# Altium PCB e3rev2.PcbDoc (part 1 of 2)
Units mm, origin at the board's own origin, x right, y up, seen from the top; angles counter-clockwise.
Board outline 65 x 49 mm, 4 copper layers (Top Layer, Int1 (GND), Int2 (PWR), Bottom Layer), stack 1.57 mm thick; 59 components, 45 nets, 231 pads, 138 vias.
Unrouted connection lines stored in the file: 2.
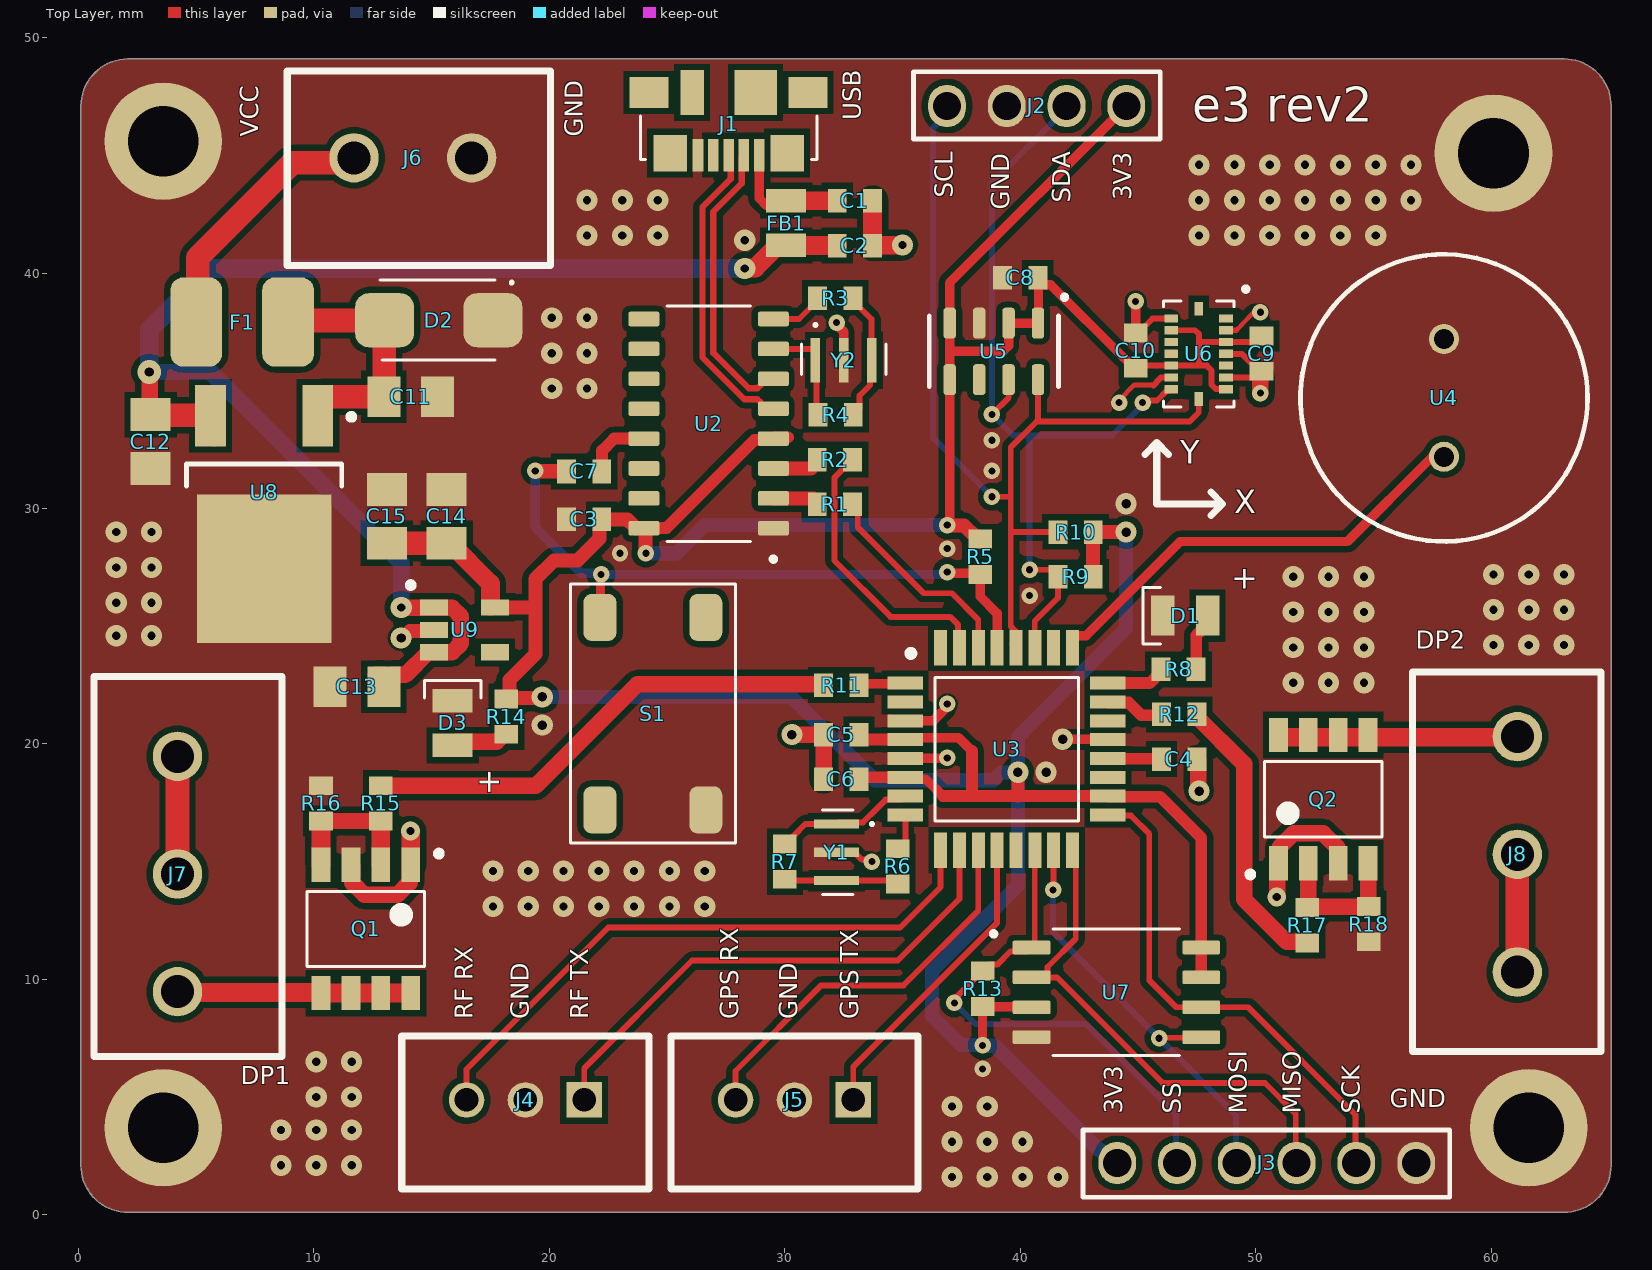
[diagram p0: Top Layer view]
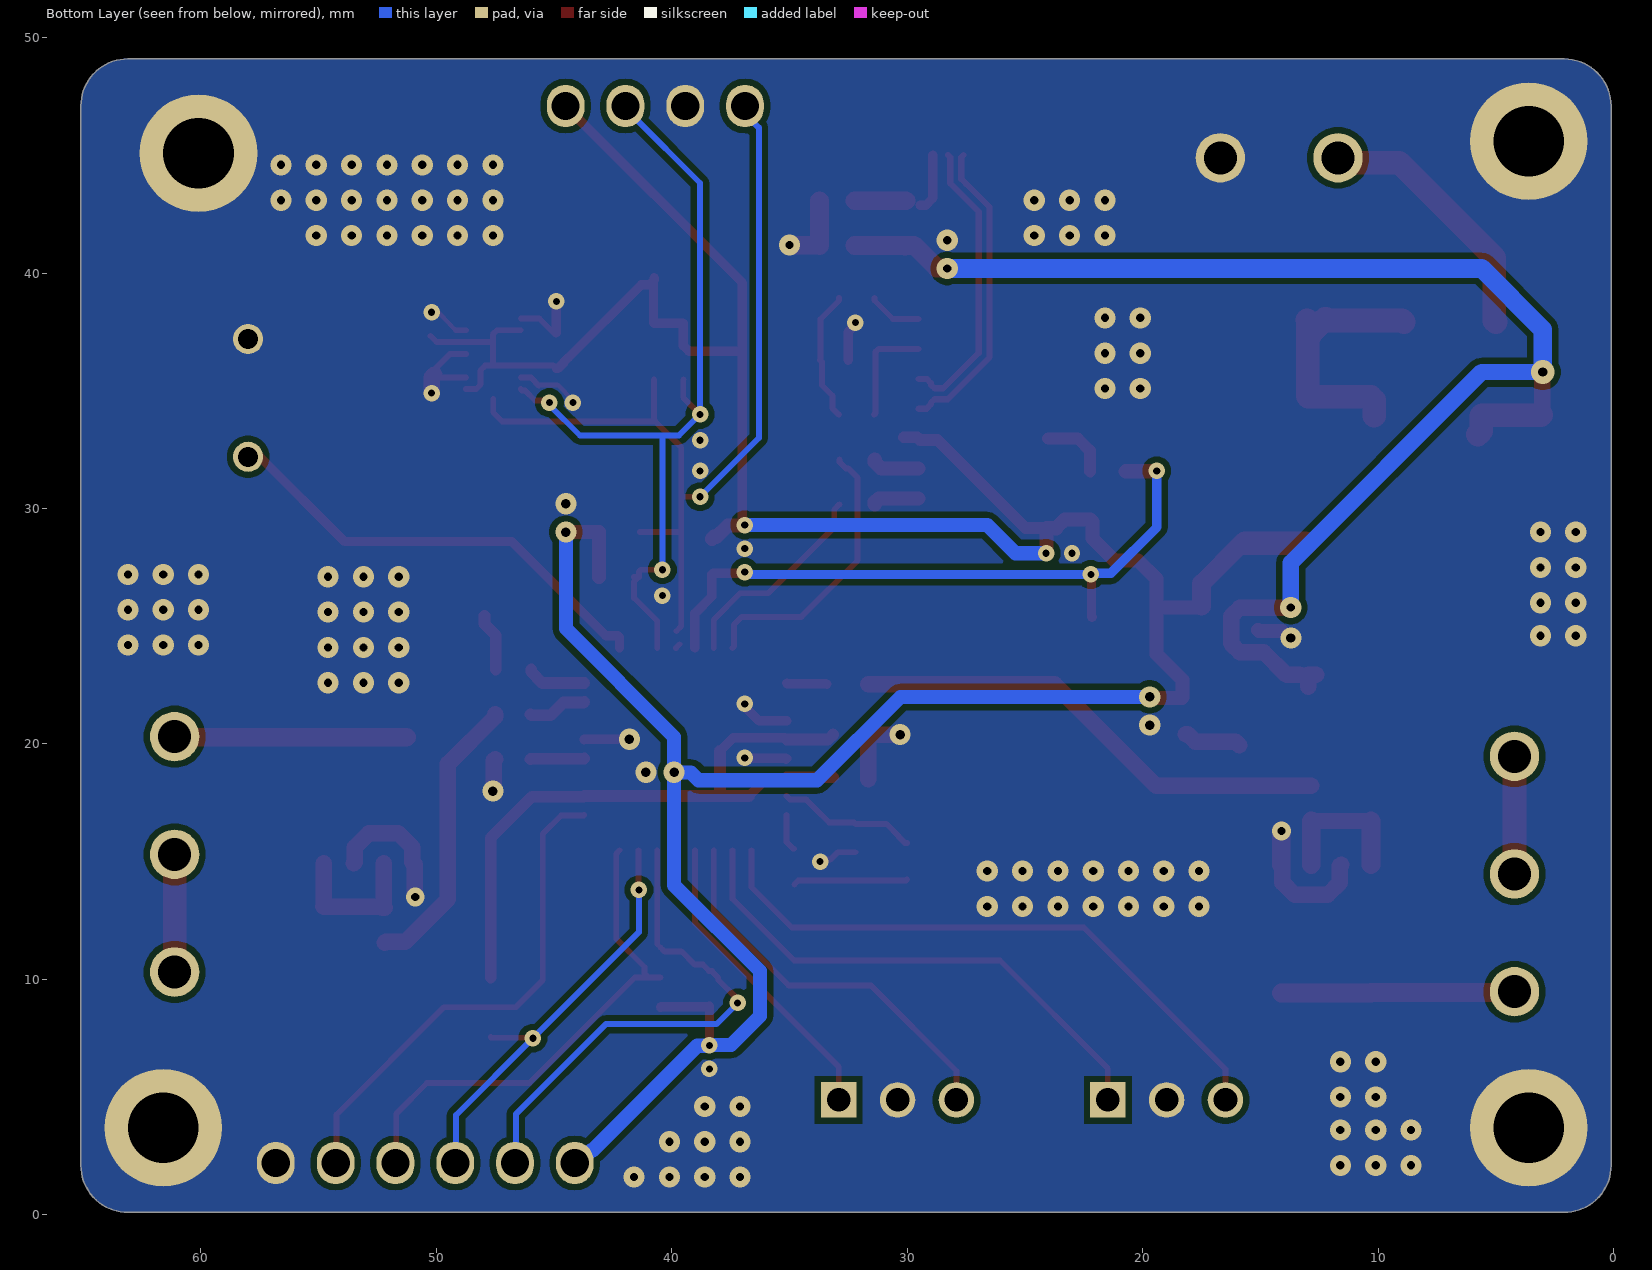
[diagram p1: Bottom Layer view, seen from below]
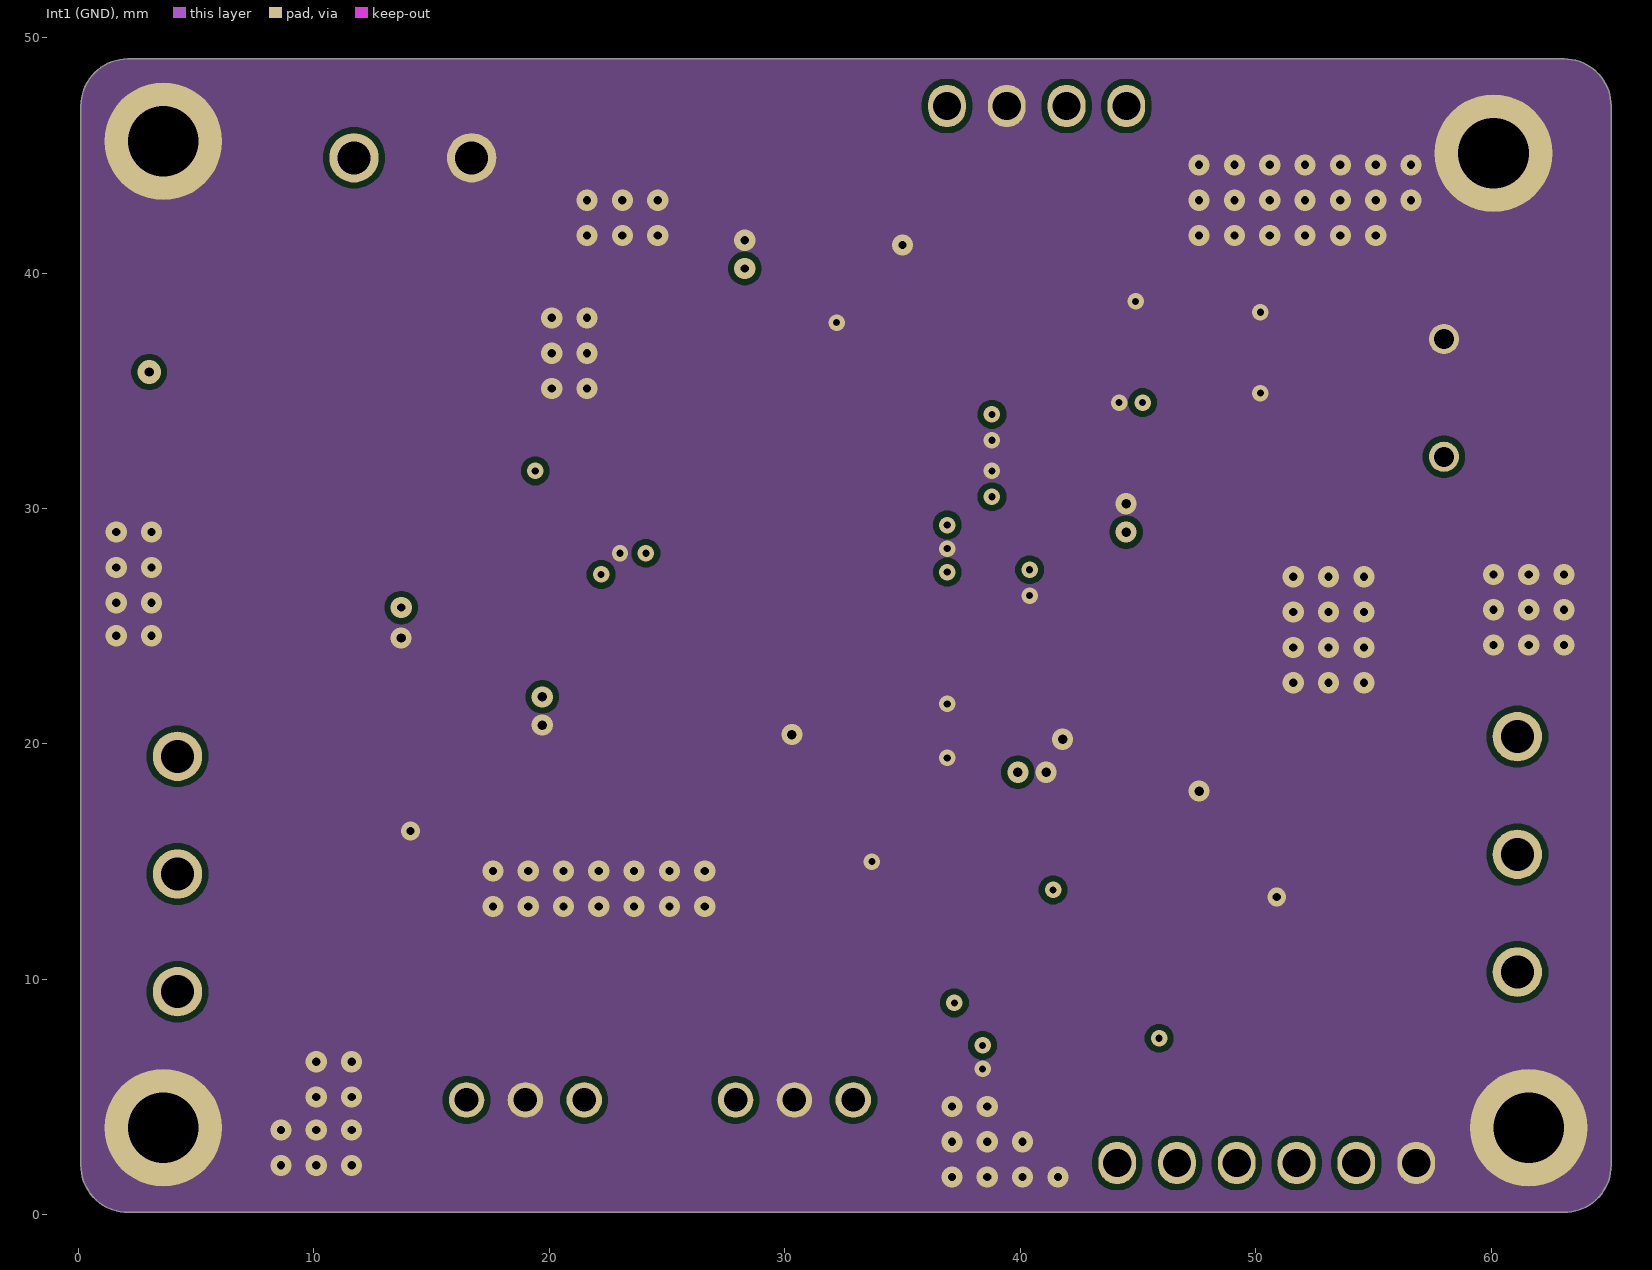
[diagram p2: Int1 (GND)]
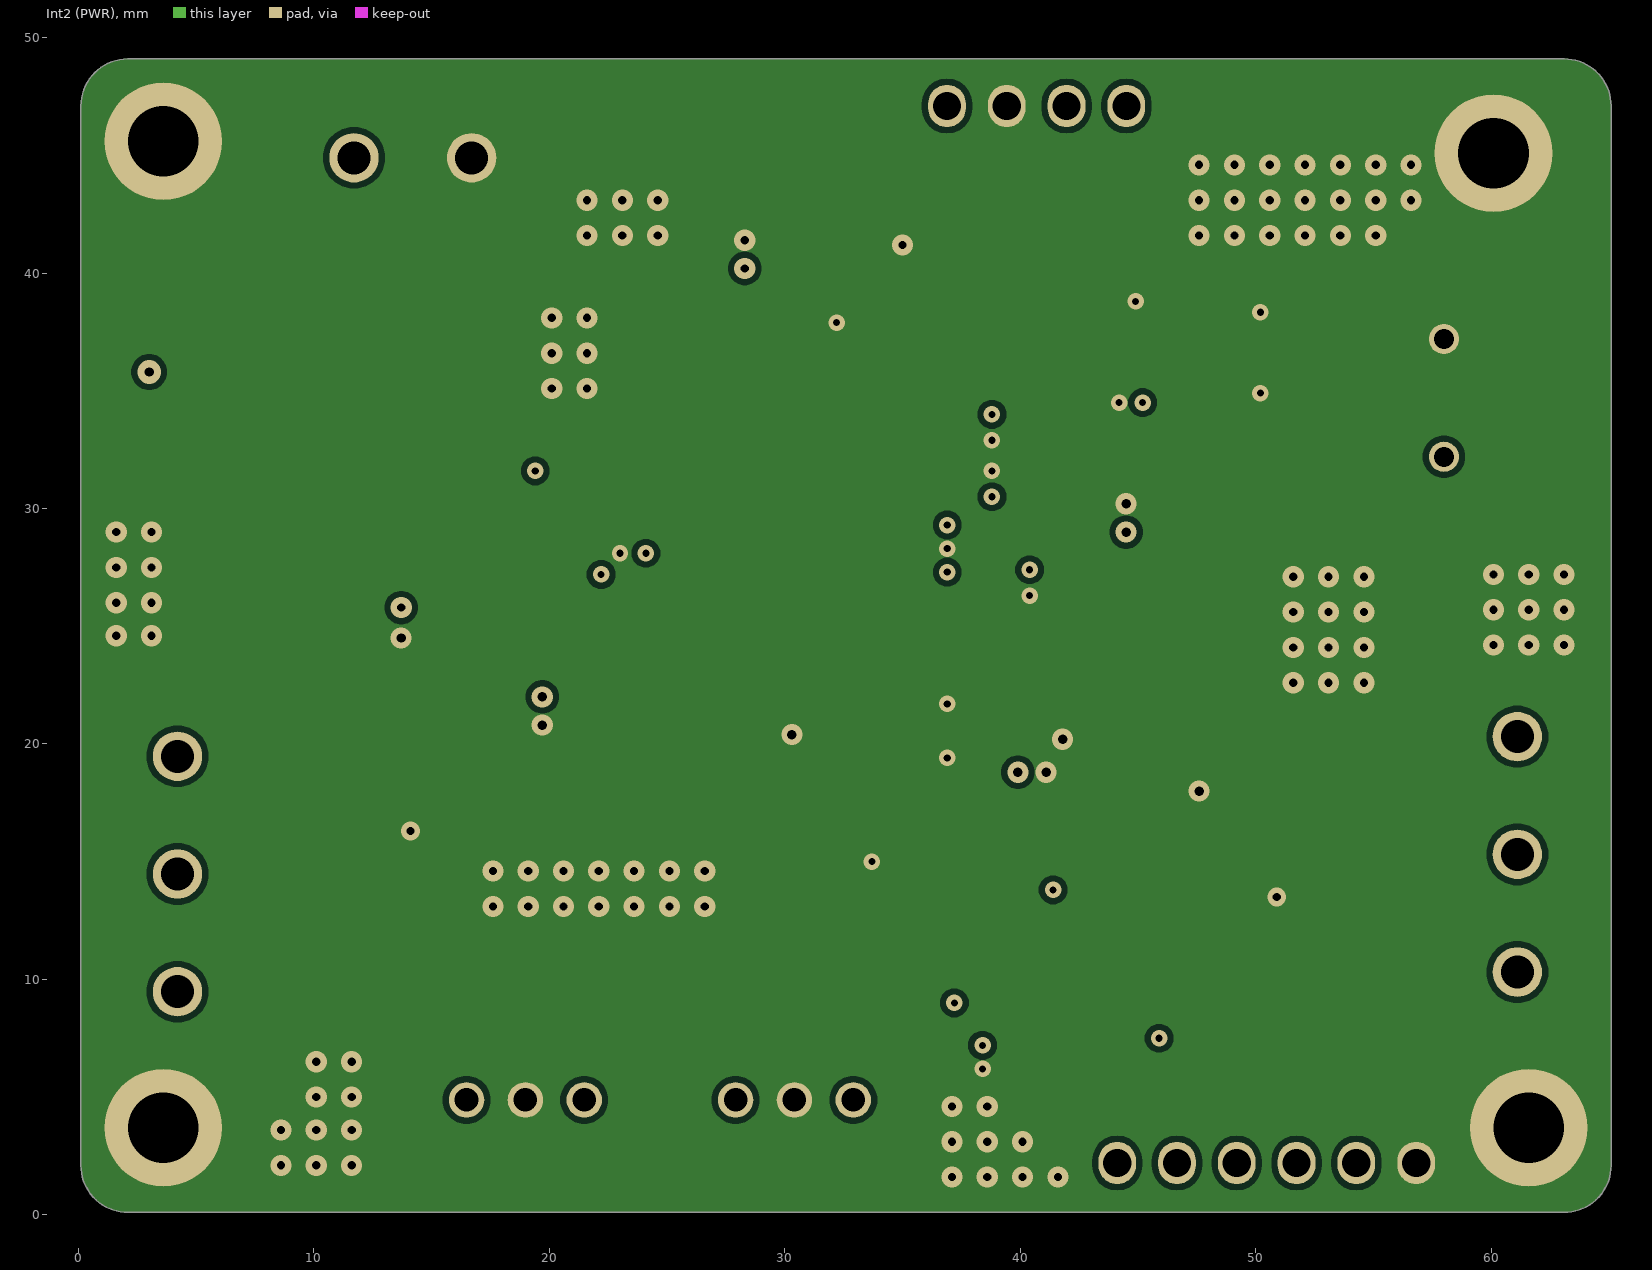
[diagram p3: Int2 (PWR)]
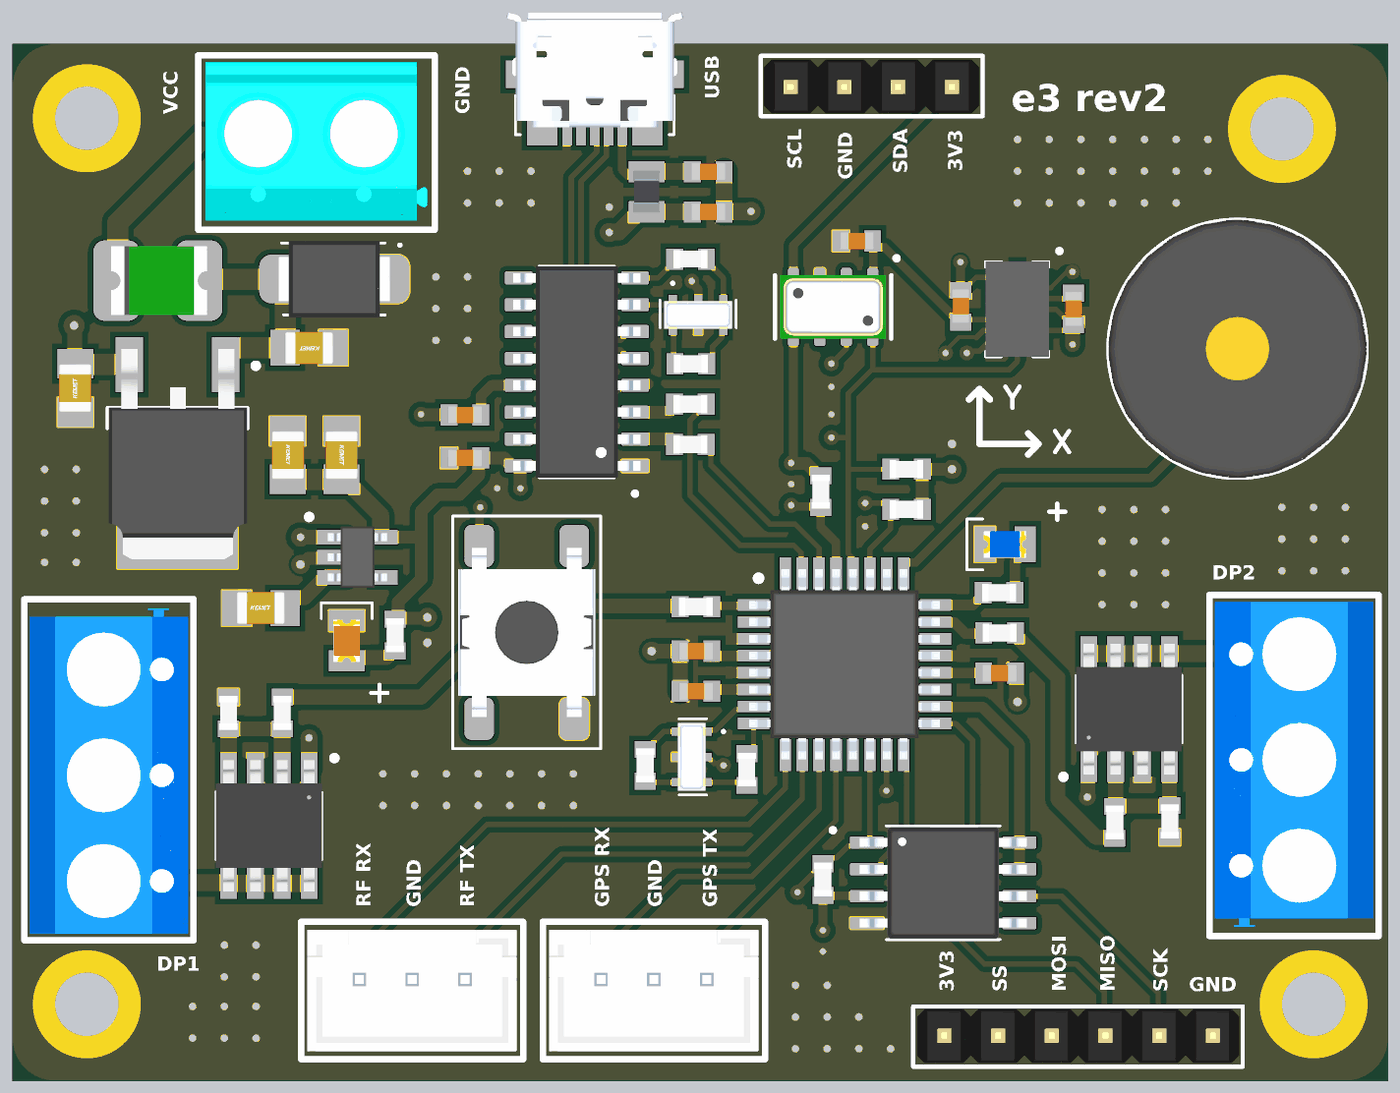
[diagram p4: 3D render of the assembled board from above, using the file's embedded part models]

## Layer stack, top to bottom
Top Solder: solder mask 0.0254, SM-001, Dk 4
Top Layer: signal copper 0.035
Dielectric 1: prepreg 0.2, PP-017, Dk 4.6
Int1 (GND): signal copper 0.0175
Dielectric 3: core 1.065, Core-039, Dk 4.6
Int2 (PWR): signal copper 0.0175
Dielectric 5: prepreg 0.2, PP-017, Dk 4.6
Bottom Layer: signal copper 0.035
Bottom Solder: solder mask 0.0254, SM-001, Dk 4

## Board outline
2.1,0.1 cw(c2.1,2.1) 0.1,2.1 0.1,47.1 cw(c2.1,47.1) 2.1,49.1 63.1,49.1 cw(c63.1,47.1) 65.1,47.1 65.1,2.1 cw(c63.1,2.1) 63.1,0.1

## Design rules (kind name [scope] priority, off if disabled: settings)
Clearance [All] p1: gap=0.254 ignorepadtopadclearanceinfootprint=FALSE except(0.1: SMDPad-SMDPad; 0.2: Arc-Arc Arc-Track Arc-SMDPad Arc-Hole Track-Track Track-SMDPad Track-Hole SMDPad-THPad SMDPad-Hole THPad-Hole Via-Hole Fill-Hole Poly-Hole Region-Hole Text-Hole; 0.3: Arc-Via Track-Via Via-Via; 0.33: Arc-THPad Track-THPad; 0.5: THPad-THPad)
DiffPairsRouting [All] p1: maxlimit=0.254 minlimit=0.203 mostfreqgap=0.254 toplayer_maxgap=0.203 toplayer_prefgap=0.203 toplayer_minwidth=0.26 toplayer_maxwidth=0.26 toplayer_prefwidth=0.26 midlayer1_minwidth=0.381 midlayer1_maxwidth=0.381 midlayer1_prefwidth=0.381 midlayer2_minwidth=0.381 midlayer2_maxwidth=0.381 midlayer2_prefwidth=0.381 bottomlayer_maxgap=0.203 bottomlayer_prefgap=0.203 bottomlayer_minwidth=0.26 bottomlayer_maxwidth=0.26 bottomlayer_prefwidth=0.26 maxuncoupledlength=12.7
HoleSize [All] p1: absolutevalues=TRUE maxlimit=6 minlimit=0.3 maxpercent=80.000 minpercent=20.000
HoleToHoleClearance [All] p1: gap=0.5 allowstackedmicrovias=TRUE
MinimumSolderMaskSliver [All] p1: minsoldermaskwidth=0.005
PlaneConnect [All] p1: planeconnectstyle=Direct reliefexpansion=0.508 reliefentries=4 reliefconductorwidth=0.254 reliefairgap=0.254
PolygonConnect [All] p1: connectstyle=Direct reliefconductorwidth=0.254 reliefentries=4 polygonreliefangle="90 Angle" airgapwidth=0.254
RoutingVias [All] p1: holewidth=0.3 width=0.7 viastyle="Through Hole" minholewidth=0.3 minwidth=0.5 maxholewidth=0.7 maxwidth=1
SilkToSilkClearance [All] p1: silktosilkclearance=0.2
SolderMaskExpansion [All] p1: expansion=0.05 istentingtop=FALSE
UnRoutedNet [All] p1: checkbadconnections=TRUE
Width [All] p1: maxlimit=1 minlimit=0.2 preferedwidth=0.3 minimp=50.000000 maximp=50.000000 favimp=50.000000
23 further rules are at their usual default settings.

## Classes and differential pairs
differential pair class DIFF_USB: USB_D
component class Power: C11 C12 C13 C14 C15 D2 D3 F1 J6 J7 J8 Q1 Q2 R14 R15 R16 R17 R18 U8 U9
component class Peripheral: C8 C9 C10 J2 J3 J4 J5 R13 U5 U6 U7
component class MCU: C1 C2 C3 C4 C5 C6 C7 D1 FB1 J1 R1 R2 R3 R4 R5 R6 R7 R8 R9 R10 S1 U2 U3 U4 Y1 Y2
differential pair USB_D: +USB_D_P -USB_D_N

## Components (designator, comment, footprint, x,y, rotation, side; value= is the part's Value field where it differs from the comment)
C1 "2u2" "CAP 0603" 32.979,43.077 r0 top
C2 "2u2" "CAP 0603" 32.979,41.172 r0 top
C3 "100n" "CAP 0603" 21.475,29.542 r0 top
C4 "100n" "CAP 0603" 46.753,19.355 r0 top
C5 "100n" "CAP 0603" 32.4,20.4 r0 top
C6 "4u7" "CAP 0603" 32.4,18.5 r0 top
C7 "100n" "CAP 0603" 21.475,31.574 r180 top
C8 "100n" "CAP 0603" 40,39.8 r0 top
C9 "100n" "CAP 0603" 50.25,36.584 r90 top
C10 "100n" "CAP 0603" 44.916,36.711 r270 top
C11 "0u33" "CAP 0805" 14.109,34.749 r180 top
C12 "100n" "CAP 0805" 3.06,32.844 r90 top
C13 "100n" "CAP 0805" 11.823,22.43 r0 top
C14 "4u7" "CAP 0805" 15.633,29.669 r270 top
C15 "100n" "CAP 0805" 13.093,29.669 r270 top
D1 "LED 0805 BLUE" "LED 0805 BLUE" 47.007,25.451 r0 top
D2 "SMBJ12CA-13-F" SMBJ12CA-13-F 15.3,38 r0 top
D3 "LED 0805 RED" "LED 0805 RED" 15.887,20.894 r270 top
F1 "0ZCG0075FF2C" 0ZCG0075FF2C 7.002,38.049 r0 top
FB1 "120R" "FB 0805" 30.058,42.127 r90 top
J1 "47346-0001" MOLEX_47346-0001 27.613,47.675 r180 top
J2 "1x4 HEADER MALE" "1X4 HEADER MALE" 40.7,47.1 r0 top
J3 "1x6 HEADER MALE" "1X6 HEADER MALE" 50.47,2.2 r180 top
J4 "JST B3B-XH-A" JST_B3B-XH-A 18.98,4.352 r180 top
J5 "JST B3B-XH-A" JST_B3B-XH-A 30.41,4.352 r180 top
J6 "KF301 2P Terminal" "KF301 2P" 14.2,44.9 r0 top
J7 "KF301 3P Terminal" "KF301 3P" 4.203,14.476 r90 top
J8 "KF301 3P Terminal" "KF301 3P" 61.117,15.311 r270 top
Q1 "DMG4822SSD-13" DMG4822SSD-13 12.204,12.143 r270 top
Q2 "DMG4822SSD-13" DMG4822SSD-13 52.873,17.657 r90 top
R1 "1K" "RES 0603" 32.131,30.177 r0 top
R2 "1K" "RES 0603" 32.131,32.082 r0 top
R3 "27R" "RES 0603" 32.143,38.94 r180 top
R4 "1M" "RES 0603" 32.155,33.987 r180 top
R5 "10K" "RES 0603" 38.3,27.95 r270 top
R6 "27R" "RES 0603" 34.8,14.8 r90 top
R7 "1M" "RES 0603" 30,15 r90 top
R8 "1K" "RES 0603" 46.724,23.165 r0 top
R9 "10K" "RES 0603" 42.35,27.1 r0 top
R10 "10K" "RES 0603" 42.35,29 r0 top
R11 "1K" "RES 0603" 32.4,22.5 r180 top
R12 "1K" "RES 0603" 46.753,21.26 r0 top
R13 "10K" "RES 0603" 38.4,9.6 r270 top
R14 "1K" "RES 0603" 18.173,21.16 r270 top
R15 "1K" "RES 0603" 12.839,17.477 r270 top
R16 "10K" "RES 0603" 10.299,17.477 r270 top
R17 "1K" "RES 0603" 52.2,12.3 r90 top
R18 "10K" "RES 0603" 54.8,12.35 r90 top
S1 "B3FS-1000P" B3FS-1000P 24.396,21.287 r270 top
U2 "CH340G" CH340G 26.765,33.606 r180 top
U3 "ATMEGA328P-AU" ATMEGA328P-AU 39.42,19.784 r0 top
U4 "PS1240P02BT" PS1240P02BT 58,34.7 r270 top
U5 "MS561101BA03-50" MS5611-01BA3 38.881,36.678 r270 top
U6 "BMI088" BMI088 47.583,36.572 r270 top
U7 "W25Q64JVSSIQ" W25Q64JVSSIQ 44.086,9.449 r0 top
U8 "L78M05CDT-TR" L78M05CDT-TR 7.886,29.796 r270 top
U9 "MIC5205-3.3YM5-TR" MIC5205-3.3YM5-TR 16.395,24.843 r270 top
Y1 "CSTNE16M0V53Z000R0" CSTNE16M0V53Z000R0 32.2,15.4 r270 top
Y2 "CSTNE12M0G550000R0" CSTNE16M0V53Z000R0 32.5,36.3 r0 top

## Footprints (in the part's own frame and the unit in brackets; to place one, negate y for a bottom-side part, rotate by r counter-clockwise, add the part's x,y. Pads: shape width x height; smd on the part's side, far side on the other; paste and mask are expansions set on the pad)
0ZCG0075FF2C [mm] "PTC"
  rrect50% 2.2x3.8 smd: 1(-2,-0.125) 2(1.9,-0.125)
  body extent -2.26,-1.75 2.29,1.49, height 0.7
"1X4 HEADER MALE" [mm]
  oval 1.6x1.8 hole 1.2: 1(-3.81,0) 2(-1.27,0) 3(1.27,0) 4(3.81,0)
  silkscreen extent -5.23,-1.4 5.25,1.45, body extent -5.08,-1.27 5.08,1.27, height 9.2
"1X6 HEADER MALE" [mm]
  oval 1.6x1.8 hole 1.2: 1(-6.35,0) 2(-3.81,0) 3(-1.27,0) 4(1.27,0) 5(3.81,0) 6(6.35,0)
  silkscreen extent -7.77,-1.4 7.8,1.45, body extent -7.62,-1.27 7.62,1.27, height 9.2
ATMEGA328P-AU [mm]
  rect 1.5x0.55 smd: 1(-4.3,2.8) 2(-4.3,2) 3(-4.3,1.2) 5(-4.3,-0.4) 6(-4.3,-1.2) 7(-4.3,-2) 8(-4.3,-2.8) 17(4.3,-2.8) 18(4.3,-2) 19(4.3,-1.2) 20(4.3,-0.4) 21(4.3,0.4) 22(4.3,1.2) 23(4.3,2) 24(4.3,2.8) ""(-4.3,0.4)
  rect 0.55x1.5 smd: 9(-2.8,-4.3) 10(-2,-4.3) 11(-1.2,-4.3) 12(-0.4,-4.3) 13(0.4,-4.3) 14(1.2,-4.3) 15(2,-4.3) 16(2.8,-4.3) 25(2.8,4.3) 26(2,4.3) 27(1.2,4.3) 28(0.4,4.3) 29(-0.4,4.3) 30(-1.2,4.3) 31(-2,4.3) 32(-2.8,4.3)
  silkscreen extent -4.19,-3.05 3.05,4.19, body extent -4.5,-4.5 4.5,4.5, height 1.2
B3FS-1000P [mm]
  rrect50% 2x1.4 smd: 1(4.088,-2.25) 2(-4.087,-2.25) 3(4.088,2.25) 4(-4.087,2.25)
  silkscreen extent -5.5,-3.5 5.5,3.5, body extent -4,-3.25 4,3.25, height 3.11
BMI088 [mm]
  rect 0.35x0.59 smd: 1(-1.5,1.165) 2(-1,1.165) 3(-0.5,1.165) 4(0,1.165) 5(0.5,1.165) 6(1,1.165) 7(1.5,1.165) 9(1.5,-1.165) 10(1,-1.165) 11(0.5,-1.165) 12(0,-1.165) 13(-0.5,-1.165) 14(-1,-1.165) 15(-1.5,-1.165)
  rect 0.59x0.35 smd: 8(1.915,0) 16(-1.915,0)
  silkscreen extent -2.85,-1.5 2.25,2.1, body extent -2.25,-1.5 2.25,1.5, height 1.55
"CAP 0603" [mm]
  rect 0.8x1 smd: 1(-0.75,0) 2(0.75,0)
  body extent -0.8,-0.4 0.8,0.4, height 0.51
"CAP 0805" [mm]
  rect 1.4x1.7 smd: 1(-1.143,0) 2(1.143,0)
  body extent -1.15,-0.76 1.15,0.79, height 1.01
CH340G [mm]
  rrect25% 1.31x0.62 smd: 1(-2.75,4.445) 2(-2.75,3.175) 3(-2.75,1.905) 4(-2.75,0.635) 5(-2.75,-0.635) 6(-2.75,-1.905) 7(-2.75,-3.175) 8(-2.75,-4.445) 9(2.75,-4.445) 10(2.75,-3.175) 11(2.75,-1.905) 12(2.75,-0.635) 13(2.75,0.635) 14(2.75,1.905) 15(2.75,3.175) 16(2.75,4.445)
  silkscreen extent -2.85,-5 1.78,5.85, body extent -3,-5 3,5, height 1.8
CSTNE16M0V53Z000R0 [mm]
  rect 0.4x1.9 smd: 1(-1.2,0) 2(0,0) 3(1.2,0)
  silkscreen extent -1.8,-0.6 1.8,1.55, body extent -1.6,-0.65 1.6,0.65, height 1
DMG4822SSD-13 [mm]
  rect 1.45x0.8 smd: 1(-2.725,1.905) 2(-2.725,0.635) 3(-2.725,-0.635) 4(-2.725,-1.905) 5(2.725,-1.905) 6(2.725,-0.635) 7(2.725,0.635) 8(2.725,1.905)
  silkscreen extent -3.32,-2.5 1.6,3.22, body extent -3.1,-2.5 3.1,2.5, height 1.7
"FB 0805" [mm]
  rect 1x1.7 smd: 1(-0.95,0) 2(0.95,0)
  body extent -1,-0.63 1,0.63, height 0.86
JST_B3B-XH-A [mm]
  rect 1.508x1.508 / inner round 1.508 / far side rect 1.508x1.508 hole 1: 1(-2.5,-0.525)
  round 1.508 hole 1: 2(0,-0.525) 3(2.5,-0.525)
  silkscreen extent -5.25,-3.25 5.25,3.25, body extent -4.95,-2.88 4.95,2.88, height 7
"KF301 2P" [mm] "2 Pin 5mm Terminal"
  round 2.1 hole 1.4: 1(-2.5,0) 2(2.5,0)
  silkscreen extent -5.33,-4.57 5.84,3.68, body extent -5,-4.13 5.5,3.37, height 10
"KF301 3P" [mm] "3 Pin 5mm Terminal"
  round 2.1 hole 1.4: 1(-5,0) 2(0,0) 3(5,0)
  silkscreen extent -7.75,-4.45 8.38,3.56, body extent -7.45,-4.19 7.95,3.31, height 10.01
L78M05CDT-TR [mm]
  rect 2.6x1.3 smd: 1(-4.15,2.28) 3(-4.15,-2.28)
  rect 6.3x5.7 smd: 2(2.35,0)
  silkscreen extent -4.22,-3.3 -1.15,3.83, body extent -4.89,-3.25 5.04,3.29, height 2.34
"LED 0805 BLUE" [mm]
  rect 1x1.7 smd: A(0.95,0) K(-0.95,0)
  silkscreen extent -1.8,-1.2 -1.05,1.2, body extent -1,-0.63 1,0.63, height 1.12
"LED 0805 RED" [mm]
  rect 1x1.7 smd: A(0.95,0) K(-0.95,0)
  silkscreen extent -1.8,-1.2 -1.05,1.2, body extent -1,-0.63 1,0.63, height 1.12
MIC5205-3.3YM5-TR [mm]
  rect 0.69x1.2 smd: 1(-0.95,-1.3) 2(0,-1.3) 3(0.95,-1.3) 4(0.95,1.3) 5(-0.95,1.3)
  silkscreen extent -2,-2.39 -1.81,-2.19, body extent -1.45,-1.4 1.45,1.4, height 1.45
MOLEX_47346-0001 [mm]
  rect 0.45x1.38 smd: 1(-1.3,2.66) 2(-0.65,2.66) 3(0,2.66) 4(0.65,2.66) 5(1.3,2.66)
  rect 1.425x1.55 smd: S1(-2.488,2.575) S2(2.488,2.575)
  rect 1.65x1.3 smd: S3(-3.375,0) S6(3.375,0)
  rect 1.8x1.9 smd: S4(-1.15,0)
  rect 1x1.9 smd: S5(1.55,0)
  silkscreen extent -3.75,1 3.75,2.85, body extent -4.18,-2.93 4.18,2.5, height 2.7
MS5611-01BA3 [mm]
  rrect50% 1.31x0.53 smd: 1(-1.2,1.875) 2(-1.2,0.625) 3(-1.2,-0.625) 4(-1.2,-1.875) 5(1.2,-1.875) 6(1.2,-0.625) 7(1.2,0.625) 8(1.2,1.875)
  silkscreen extent -2.4,-2.75 1.5,3.1, body extent -1.5,-2.5 1.5,2.5, height 1.1
PS1240P02BT [mm] "Buzzer"
  round 1.28 hole 0.85: 1(-2.5,0) 2(2.5,0)
  silkscreen extent -6.1,-6.1 6.1,6.1, body extent -6.1,-6.1 6.1,6.1, height 6.51
"RES 0603" [mm]
  rect 0.8x1 smd: 1(-0.75,0) 2(0.75,0)
  body extent -0.8,-0.43 0.8,0.43, height 0.52
SMBJ12CA-13-F [mm]
  rrect50% 2.5x2.3 smd: 1(2.3,0) 2(-2.3,0)
  silkscreen extent -2.5,-1.7 3.15,1.7, body extent -2.65,-1.81 2.65,1.81, height 2.5
W25Q64JVSSIQ [mm] "SPI Flash Memory"
  rrect25% 1.61x0.58 smd: 1(-3.605,1.905) 2(-3.605,0.635) 3(-3.605,-0.635) 4(-3.605,-1.905) 5(3.605,-1.905) 6(3.605,-0.635) 7(3.605,0.635) 8(3.605,1.905)
  silkscreen extent -5.31,-2.69 2.69,2.69, body extent -3.95,-2.64 3.95,2.64, height 2.16

## Part data
C1 C2 C3 C4 C5 C6 C7 C8 C9 C10: library part "CAP 0603 50V", "Capacitor SMD 0603 50V"
C11 C12 C13 C14 C15: library part "CAP 0805 50V", "Capacitor SMD 0805 50V"
D1: "LED 0805 GREEN SMD"
D2: "TVS DIODE 12VWM 19.9VC SMB", Breakdown Voltage=15.3V, Capacitance=340pF, Case/Package=SMB, Clamping Voltage=19.9V, Leakage Current=5uA, Manufacturer=Diodes, Max Operating Temperature=150°C, Max Output Current=30.2A, Max Power Dissipation=600W, Min Breakdown Voltage=13.3V, Min Operating Temperature=-55°C, Package Body Material=Plastic, Package Quantity=3000, Package Shape=Rectangular, Peak Reflow Temperature (Cel)=245°C, Power Line Protection=No, Reverse Standoff Voltage=12V, Test Current=1mA, Time @ Peak Reflow Temperature-Max (s)=5s, Category="TVS Diodes", Clamping Voltage-Max=19.9V, ComponentLink1Description=https://datasheet.ciiva.com/34302/1542303-34302437.pdf?src-supplier=Jameco, ComponentLink1URL=https://datasheet.ciiva.com/34302/1542303-34302437.pdf?src-supplier=Jameco, Diode Element Material=SILICON, Diode Type=ZENER, Direction=Bidirectional, Height=2.62mm, JESD-30 Code=R-PDSO-C2, Lead Free="Contains Lead", Length=4.57mm, Manufacturer Part Number=SMBJ12CA-13-F, Max Breakdown Voltage=15.3V, Max Reverse Leakage Current=5uA, Max Surge Current=30.2A, Moisture Sensitivity Level=1, Mount="Surface Mount", Number of Bidirectional Channels=1, Number of Elements=1, Number of Pins=2, Packaging="Tape and Reel", Peak Pulse Current=30.2A, Peak Pulse Power=600W, Polarity=Bidirectional, Power Dissipation=600W, Pricing 1="3000=0,104, 9000=0,0995, 12000=0,0985, 30000=0,0953, 45000=0,0922 (USD)", Radiation Hardening=No, Reverse Breakdown Voltage=13.3V, RoHS=Yes, RoHS Compliant=Yes, Series=SMBJ, Stock 1=27000, Supplier 1="Future Electronics", Surface Mount=Yes, Technology=AVALANCHE, Terminal Finish=Tin, Terminal Form="C BEND", Terminal Position=DUAL, Termination=SMD/SMT, Voltage Rating (DC)=12V, Width=3.9mm, Working Voltage=12V
D3: "LED 0805 RED SMD"
F1: "PTC Resettable Fuse 0.75A(hold) 1.5A(trip) 16VDC 100A 0.8W 0.2s 0.11Ohm SMD Solder Pad 1812 4.73 X 3.41 X 0.65mm T/R...", Case Code (Metric)=4532, Case Code (Imperial)=1812, Hold Current=750mA, Manufacturer=Bel, Max Current Rating=100A, Max Operating Temperature=85°C, Min Operating Temperature=-40°C, Trip Current=1.5A, Case/Package=1812, Category="PTC Resettable Fuses", ComponentLink1Description=https://datasheet.ciiva.com/18550/0zcg-18550523.pdf?src-supplier=Digi-Key, ComponentLink1URL=https://datasheet.ciiva.com/18550/0zcg-18550523.pdf?src-supplier=Digi-Key, ComponentLink2Description=https://datasheet.ciiva.com/18550/0zcg-18550524.pdf?src-supplier=Digi-Key, ComponentLink2URL=https://datasheet.ciiva.com/18550/0zcg-18550524.pdf?src-supplier=Digi-Key, ComponentLink3Description=https://datasheet.ciiva.com/18550/0zcg-18550767.pdf?src-supplier=Digi-Key, ComponentLink3URL=https://datasheet.ciiva.com/18550/0zcg-18550767.pdf?src-supplier=Digi-Key, Contact Plating=Tin,Matte, Lead Free="Lead Free", Manufacturer Part Number=0ZCG0075FF2C, Mount="Surface Mount", Packaging="Cut Tape", Pricing 1="2000=0,0751, 4000=0,0699, 6000=0,065, 10000=0,0604 (USD)", RoHS=Yes, RoHS Compliant=Yes, Series=0ZCG, Stock 1=4661, Supplier 1="Arrow Electronics", Time to Trip=200ms
FB1: library part "FB 0805", "Ferrite Bead SMD 0805"
J1: "Micro-USB B Receptacle with Flange, Bottom Mount, Surface Mount, Lead-Free", Color=Black, Contact Current Rating=1A, Contact Resistance=40mR, Current Rating=1.8A, Flammability Rating="UL94 V-0", Manufacturer=Molex, Max Operating Temperature=85°C, Max Voltage Rating (AC)=30V, Min Operating Temperature=-20°C, Category="Headers and Wire Housings", ComponentLink1Description=https://datasheet.ciiva.com/30075/304740473460001-io-nectors-30075527.pdf?src-supplier=Onlinecomponents.com, ComponentLink1URL=https://datasheet.ciiva.com/30075/304740473460001-io-nectors-30075527.pdf?src-supplier=Onlinecomponents.com, ComponentLink2Description=https://datasheet.ciiva.com/22654/1630785-22654942.pdf?src-supplier=Element14, ComponentLink2URL=https://datasheet.ciiva.com/22654/1630785-22654942.pdf?src-supplier=Element14, ComponentLink3Description=https://datasheet.ciiva.com/16148/1700180473460001-io-nectors-16148917.pdf?src-supplier=Onlinecomponents.com, ComponentLink3URL=https://datasheet.ciiva.com/16148/1700180473460001-io-nectors-16148917.pdf?src-supplier=Onlinecomponents.com, ComponentLink4Description=https://datasheet.ciiva.com/16986/70266948-16986683.pdf?src-supplier=Allied+Electronics, ComponentLink4URL=https://datasheet.ciiva.com/16986/70266948-16986683.pdf?src-supplier=Allied+Electronics, ComponentLink5Description=https://datasheet.ciiva.com/28504/0473460001-io-connectors-28504587.pdf?src-supplier=Element14, ComponentLink5URL=https://datasheet.ciiva.com/28504/0473460001-io-connectors-28504587.pdf?src-supplier=Element14, ComponentLink6Description=https://datasheet.ciiva.com/46390/1681853-46390956.pdf?src-supplier=Element14, ComponentLink6URL=https://datasheet.ciiva.com/46390/1681853-46390956.pdf?src-supplier=Element14, Connector Type=USB,Receptacle, Contact Material="Copper Alloy,Copper", Contact Plating=Gold, Gender=Female, Glow Wire Compliant=Non-compliant, Halogen Free="Low Halogen", Housing Material=Polymer, Lead Free="Lead Free", Manufacturer Part Number=47346-0001, Mount="Surface Mount", Number of Circuits=5, Number of Contacts=5, Number of Ports=1, Number of Positions=5, Number of Rows=1, Orientation="Right Angle", Packaging="Tape and Reel", Pitch=0.65mm, Pricing 1="14000=0,5225 (USD)", Reach SVHC Compliant=Unknown, RoHS=Yes, RoHS Compliant=Yes, Series=47346, Stock 1=14156, Supplier 1="Sager Electronics", Termination=SMD/SMT, USB Standard="USB 2.0", Voltage Rating=30V, Voltage Rating (AC)=30V
J4 J5: "Connector Header, XH Series, 3 Position, 2.50mm, Through Hole, Press-Fit, Solder, Natural", Manufacturer=JST, Manufacturer Part Number=B3B-XH-A(LF)(SN), Category="Headers and Wire Housings", ComponentLink1Description=https://datasheet.ciiva.com/26894/getdatasheetpartid-640434-26894454.pdf?src-supplier=Verical, ComponentLink1URL=https://datasheet.ciiva.com/26894/getdatasheetpartid-640434-26894454.pdf?src-supplier=Verical, ComponentLink2Description=https://datasheet.ciiva.com/26894/getdatasheetpartid-440399-26894778.pdf?src-supplier=Verical, ComponentLink2URL=https://datasheet.ciiva.com/26894/getdatasheetpartid-440399-26894778.pdf?src-supplier=Verical, ComponentLink3Description=https://datasheet.ciiva.com/11746/0900766b8082653f-11746520.pdf?src-supplier=Rs, ComponentLink3URL=https://datasheet.ciiva.com/11746/0900766b8082653f-11746520.pdf?src-supplier=Rs, Pricing 1="1=39,94, 10=25,1, 50=21,68, 100=18,25, 500=17,57, 1000=17,12, 2000=16,44, 4000=15,79 (JPY)", RoHS=Yes, Stock 1=2101, Supplier 1=CoreStaff
J6: "2 Pin Screw Terminal Block 5mm"
J7 J8: "3 Pin Screw Terminal Block 5mm"
Q1 Q2: "Dual N-Channel 30 V 1.42 W 10.5 nC Enhancement Mode Mosfet - SOIC-8", Case/Package=SOIC, Continuous Drain Current (ID)=10A, Drain to Source Resistance=20mR, Drain to Source Voltage (Vdss)=30V, Gate to Source Voltage (Vgs)=25V, Manufacturer=Diodes, Max Operating Temperature=150°C, Max Power Dissipation=1.42W, Min Operating Temperature=-55°C, Package Quantity=2500, Input Capacitance=478.9pF, Category=MOSFETs, ComponentLink1Description=https://datasheet.ciiva.com/4443/dmg4822ssd-10758-4443079.pdf?src-supplier=Mouser, ComponentLink1URL=https://datasheet.ciiva.com/4443/dmg4822ssd-10758-4443079.pdf?src-supplier=Mouser, ComponentLink2Description=https://datasheet.ciiva.com/6386/dmg4822ssd-6386688.pdf?src-supplier=Digi-Key, ComponentLink2URL=https://datasheet.ciiva.com/6386/dmg4822ssd-6386688.pdf?src-supplier=Digi-Key, ComponentLink3Description=https://datasheet.ciiva.com/11174/dmg4822ssd-11174891.pdf?src-supplier=Avnet, ComponentLink3URL=https://datasheet.ciiva.com/11174/dmg4822ssd-11174891.pdf?src-supplier=Avnet, Fall Time=3.1ns, FET Type="2 N-Channel", Height=1.5mm, Lead Free="Lead Free", Length=4.95mm, Manufacturer Part Number=DMG4822SSD-13, Mount="Surface Mount", Number of Channels=2, Number of Pins=8, Packaging="Tape and Reel", Polarity=N-CHANNEL, Pricing 1="1=0,5556, 10=0,4998, 25=0,4948, 100=0,3987, 250=0,3947, 500=0,3232, 1000=0,265 (USD)", Radiation Hardening=No, Rds On Max=20mR, Reach SVHC Compliant=Yes, Rise Time=7.9ns, RoHS=Yes, RoHS Compliant=Yes, Series=-, Stock 1=2374, Supplier 1="Arrow Electronics", Turn-Off Delay Time=14.6ns, Turn-On Delay Time=2.9ns, Weight=0.00261oz, Width=3.95mm
R1 R2 R3 R4 R5 R6 R7 R8 R9 R10 R11 R12 R13 R14 R15 R16 R17 R18: library part "RES 0603", "Resistor SMD 0603"
S1: "Switch Tactile N.O. SPST Flat Round Button Gull Wing 0.05A 24VDC 0.98N SMD T/R", Actuator Color=Black, Case/Package=SMD/SMT, Contact Current Rating=50mA, Contact Resistance=100mR, Manufacturer=Omron, Max Operating Temperature=70°C, Max Voltage Rating (DC)=24V, Min Operating Temperature=-20°C, Operating Force=0.98N, Package Quantity=3000, Ratings=IP00, Actuator Length=0.5mm, Actuator Type=Standard, Category="Tactile Switches", ComponentLink1Description=https://datasheet.ciiva.com/1532/en-b3fs-1532627.pdf?src-supplier=Element14, ComponentLink1URL=https://datasheet.ciiva.com/1532/en-b3fs-1532627.pdf?src-supplier=Element14, ComponentLink2Description=https://datasheet.ciiva.com/16154/en-b3fs-16154936.pdf?src-supplier=Onlinecomponents.com, ComponentLink2URL=https://datasheet.ciiva.com/16154/en-b3fs-16154936.pdf?src-supplier=Onlinecomponents.com, ComponentLink3Description=https://datasheet.ciiva.com/26827/getdatasheetpartid-131603-26827237.pdf?src-supplier=Verical, ComponentLink3URL=https://datasheet.ciiva.com/26827/getdatasheetpartid-131603-26827237.pdf?src-supplier=Verical, ComponentLink4Description=https://datasheet.ciiva.com/30214/b3fs-0714-30214221.pdf?src-supplier=Onlinecomponents.com, ComponentLink4URL=https://datasheet.ciiva.com/30214/b3fs-0714-30214221.pdf?src-supplier=Onlinecomponents.com, ComponentLink5Description=https://datasheet.ciiva.com/2899/en-b3fs-2899745.pdf?src-supplier=Digi-Key, ComponentLink5URL=https://datasheet.ciiva.com/2899/en-b3fs-2899745.pdf?src-supplier=Digi-Key, ComponentLink6Description=https://datasheet.ciiva.com/2899/en-b3fs-2899746.pdf?src-supplier=Digi-Key, ComponentLink6URL=https://datasheet.ciiva.com/2899/en-b3fs-2899746.pdf?src-supplier=Digi-Key, ComponentLink7Description=https://datasheet.ciiva.com/2899/en-b3fs-2899744.pdf?src-supplier=Digi-Key, ComponentLink7URL=https://datasheet.ciiva.com/2899/en-b3fs-2899744.pdf?src-supplier=Digi-Key, Contact Material=Silver, Contact Plating=Silver, Current Rating=50mA, Depth=8mm, Electrical Life=1000000Cycles, Lead Free="Lead Free", Length=6.3mm, Manufacturer Part Number=B3FS-1000P, Material=Plastic, Max Current Rating=50mA, Mechanical Life=1000000Cycles, Mount="Surface Mount", Number of Poles=1, Orientation=Straight, Packaging="Tape and Reel", Pricing 1="3000=0,316, 12000=0,305 (USD)", Reach SVHC Compliant=Unknown, RoHS=Yes, RoHS Compliant=Yes, Series=B3FS, Stock 1=12000, Supplier 1="Sager Electronics", Switch Function=Off-Mom, Switch Travel=0.25mm, Termination="Gull Wing", Throw Configuration=SPST, Voltage Rating (DC)=24V, Weight=0.2g, Illumination Type=Non-Illuminated,Illuminated
U2: "USB Interface Integrated Circuit"
U3: "8-bit AVR MCU, 32 KB, 2048 Bytes, 20 MHz, 1.8 to 5.5V, TQFP-32, RoHS", Case/Package=A, Frequency=20MHz, Manufacturer=Microchip, Max Operating Temperature=85°C, Max Supply Voltage=5.5V, Min Operating Temperature=-40°C, Min Supply Voltage=1.8V, Package Quantity=250, ComponentLink1Description=https://datasheet.ciiva.com/1166/doc8161-1166860.pdf?src-supplier=Newark, ComponentLink1URL=https://datasheet.ciiva.com/1166/doc8161-1166860.pdf?src-supplier=Newark, ComponentLink2Description=https://datasheet.ciiva.com/29119/155196-da-01-en-microcontr-atmega328p-au-8bit-tqfp-32-29119594.pdf?src-supplier=Conrad, ComponentLink2URL=https://datasheet.ciiva.com/29119/155196-da-01-en-microcontr-atmega328p-au-8bit-tqfp-32-29119594.pdf?src-supplier=Conrad, ComponentLink3Description=https://datasheet.ciiva.com/1157/1693866-1157693.pdf?src-supplier=Element14, ComponentLink3URL=https://datasheet.ciiva.com/1157/1693866-1157693.pdf?src-supplier=Element14, ComponentLink4Description=https://datasheet.ciiva.com/15213/getdatasheetpartid-365828-15213131.pdf?src-supplier=Verical, ComponentLink4URL=https://datasheet.ciiva.com/15213/getdatasheetpartid-365828-15213131.pdf?src-supplier=Verical, Core Architecture=AVR, Data Bus Width=8b, Height=1mm, Lead Free="Lead Free", Length=7mm, Manufacturer Part Number=ATMEGA328P-AU, Max Frequency=20MHz, Memory Size=32KB, Memory Type=FLASH, Mount="Surface Mount", Number of ADC Channels=8, Number of Pins=32, Number of Programmable I/O=23, Number of PWM Channels=6, Number of SPI Channels=1, Number of Timers/Counters=3, Number of I2C Channels=1, Number of I/Os=23, Oscillator Type=Internal, Packaging=Tray, Peripherals="Brown-out Detect/Reset,POR,PWM,WDT", Pricing 1="1=3,05, 25=2,48, 100=2,42, 250=2,37 (EUR)", Radiation Hardening=No, RAM Size=2KB, Reach SVHC Compliant=Yes, RoHS=Yes, RoHS Compliant=Yes, Series=ATmega328P, Stock 1=196910, Supplier 1=Farnell, Watchdog Timer=Yes, Weight=0.002469oz, Width=7mm, Interface=I2C,SPI,USART
U4: "Audio Buzzer Piezo 30Vo-p 3Vo-p 70dBA Through Hole Pin Ammo", Manufacturer=TDK, Category="Audio Products", ComponentLink1Description=https://datasheet.ciiva.com/0/ef532-ps-112.pdf?src-supplier=Digi-Key, ComponentLink1URL=https://datasheet.ciiva.com/0/ef532-ps-112.pdf?src-supplier=Digi-Key, ComponentLink2Description=https://datasheet.ciiva.com/0/ef532-ps-111.pdf?src-supplier=Digi-Key, ComponentLink2URL=https://datasheet.ciiva.com/0/ef532-ps-111.pdf?src-supplier=Digi-Key, ComponentLink3Description=https://datasheet.ciiva.com/3306/ef532-ps-3306958.pdf?src-supplier=Avnet, ComponentLink3URL=https://datasheet.ciiva.com/3306/ef532-ps-3306958.pdf?src-supplier=Avnet, ComponentLink4Description=https://datasheet.ciiva.com/16225/ef532-ps-16225062.pdf?src-supplier=Onlinecomponents.com, ComponentLink4URL=https://datasheet.ciiva.com/16225/ef532-ps-16225062.pdf?src-supplier=Onlinecomponents.com, Manufacturer Part Number=PS1240P02BT, Pricing 1="1=156, 10=90, 50=60, 100=45, 500=39, 1000=34,5, 2000=30, 4000=29,1 (JPY)", RoHS=Yes, Stock 1=34, Supplier 1=CoreStaff
U5: "Pressure Sensor 1.44V to 3.6V 0.01bar to 1.2bar Absolute 8-Pin QFN T/R", Manufacturer="TE Connectivity", Category="Pressure Sensors", ComponentLink1Description=http://www.farnell.com/datasheets/2917208.pdf?src-supplier=Farnell, ComponentLink1URL=http://www.farnell.com/datasheets/2917208.pdf?src-supplier=Farnell, ComponentLink2Description=https://www.te.com/commerce/DocumentDelivery/DDEController?Action=srchrtrv&DocNm=MS5611-01BA03&DocType=Data+Sheet&DocLang=English&src-supplier=Digi-Key, ComponentLink2URL=https://www.te.com/commerce/DocumentDelivery/DDEController?Action=srchrtrv&DocNm=MS5611-01BA03&DocType=Data+Sheet&DocLang=English&src-supplier=Digi-Key, ComponentLink3Description=https://datasheet.octopart.com/MS561101BA03-50-TE-Connectivity-datasheet-21074432.pdf?src-supplier=Element14, ComponentLink3URL=https://datasheet.octopart.com/MS561101BA03-50-TE-Connectivity-datasheet-21074432.pdf?src-supplier=Element14, ComponentLink4Description=http://www.farnell.com/datasheets/1756128.pdf?src-supplier=Newark, ComponentLink4URL=http://www.farnell.com/datasheets/1756128.pdf?src-supplier=Newark, ComponentLink5Description=https://datasheet.octopart.com/MS561101BA03-50-TE-Connectivity-datasheet-65793092.pdf?src-supplier=Future+Electronics, ComponentLink5URL=https://datasheet.octopart.com/MS561101BA03-50-TE-Connectivity-datasheet-65793092.pdf?src-supplier=Future+Electronics, ComponentLink6Description=https://datasheet.octopart.com/MS561101BA03-50-TE-Connectivity-datasheet-134530980.pdf?src-supplier=Master+Electronics, ComponentLink6URL=https://datasheet.octopart.com/MS561101BA03-50-TE-Connectivity-datasheet-134530980.pdf?src-supplier=Master+Electronics, Manufacturer Part Number=MS561101BA03-50, Pricing 1="1=6,627, 10=6,524, 25=6,422, 100=6,32, 250=6,218, 500=6,115, 1000=6,013 (USD)", RoHS=Yes, Stock 1=1119, Supplier 1="Arrow Electronics"
U6: "BMI088 Series 3.6 V 6 Axis Digital Output Accelerometer Motion Sensor - LGA-16", Manufacturer="Bosch Tools", Category="Inertial Measurement Units (IMUs)", ComponentLink1Description=https://ae-bst.resource.bosch.com/media/_tech/media/product_flyer/Bosch_Sensortec_Product_flyer_BMI088.pdf?src-supplier=Digi-Key, ComponentLink1URL=https://ae-bst.resource.bosch.com/media/_tech/media/product_flyer/Bosch_Sensortec_Product_flyer_BMI088.pdf?src-supplier=Digi-Key, ComponentLink2Description=https://ae-bst.resource.bosch.com/media/_tech/media/application_notes/BST-MIS-HS001.pdf?src-supplier=Digi-Key, ComponentLink2URL=https://ae-bst.resource.bosch.com/media/_tech/media/application_notes/BST-MIS-HS001.pdf?src-supplier=Digi-Key, Manufacturer Part Number=BMI088, Pricing 1="1=3,4884, 10=3,3155, 25=3,2816, 50=3,2477, 100=3,2147, 500=3,1828 (USD)", RoHS=No, Stock 1=2228, Supplier 1="Arrow Electronics"
U7: "IC FLASH 64MBIT 104MHZ 8SOIC", Case/Package=SOIC, Frequency=133MHz, Manufacturer=Winbond, Max Operating Temperature=85°C, Min Operating Temperature=-40°C, Category=Flash, ComponentLink1Description=http://www.winbond.com/resource-files/w25q64jv%20revj%2003272018%20plus.pdf?src-supplier=Digi-Key, ComponentLink1URL=http://www.winbond.com/resource-files/w25q64jv%20revj%2003272018%20plus.pdf?src-supplier=Digi-Key, Manufacturer Part Number=W25Q64JVSSIQ, Memory Size=64Mb, Memory Type=Non-Volatile,FLASH, Mount="Surface Mount", Number of Pins=8, Packaging=Rail/Tube, Pricing 1="1=1,03, 25=0,9212, 100=0,8173, 500=0,7987, 5000=0,72112 (USD)", RoHS=Yes, RoHS Compliant=Yes, Series=SpiFlash®, Stock 1=138661, Supplier 1=Digi-Key
U8: "IC REG LDO 5V 0.5A DPAK", Case/Package=TO-252, Dropout Voltage=2V, Manufacturer=STMicroelectronics, Max Operating Temperature=150°C, Max Output Current=500mA, Max Output Voltage=5V, Max Input Voltage=35V, Min Operating Temperature=0°C, Min Input Voltage=7V, Package Quantity=2500, Power Supply Rejection Ratio (PSRR)=62dB, Quiescent Current=6mA, Tolerance=5%, Category="Voltage Regulators - Linear", ComponentLink1Description=https://datasheet.ciiva.com/34303/2021024-34303902.pdf?src-supplier=Jameco, ComponentLink1URL=https://datasheet.ciiva.com/34303/2021024-34303902.pdf?src-supplier=Jameco, ComponentLink2Description=https://datasheet.ciiva.com/4882/cd00000447-93067-4882369.pdf?src-supplier=Mouser, ComponentLink2URL=https://datasheet.ciiva.com/4882/cd00000447-93067-4882369.pdf?src-supplier=Mouser, ComponentLink3Description=https://datasheet.ciiva.com/15111/getdatasheetpartid-111001-15111751.pdf?src-supplier=Verical, ComponentLink3URL=https://datasheet.ciiva.com/15111/getdatasheetpartid-111001-15111751.pdf?src-supplier=Verical, ComponentLink4Description=https://datasheet.ciiva.com/1512/1834365-1512349.pdf?src-supplier=Element14, ComponentLink4URL=https://datasheet.ciiva.com/1512/1834365-1512349.pdf?src-supplier=Element14, ComponentLink5Description=https://datasheet.ciiva.com/14111/tbl78mxxc-data-e-14111354.pdf?src-supplier=Distrelec, ComponentLink5URL=https://datasheet.ciiva.com/14111/tbl78mxxc-data-e-14111354.pdf?src-supplier=Distrelec, ComponentLink6Description=https://datasheet.ciiva.com/46425/1834365-46425535.pdf?src-supplier=Element14, ComponentLink6URL=https://datasheet.ciiva.com/46425/1834365-46425535.pdf?src-supplier=Element14, ComponentLink7Description=https://datasheet.ciiva.com/2041/cd00000447-2041991.pdf?src-supplier=Digi-Key, ComponentLink7URL=https://datasheet.ciiva.com/2041/cd00000447-2041991.pdf?src-supplier=Digi-Key, ComponentLink8Description=https://datasheet.ciiva.com/2041/cd00000447-2041990.pdf?src-supplier=Digi-Key, ComponentLink8URL=https://datasheet.ciiva.com/2041/cd00000447-2041990.pdf?src-supplier=Digi-Key, ComponentLink9Description=https://datasheet.ciiva.com/2041/cd00000447-2041992.pdf?src-supplier=Digi-Key, ComponentLink9URL=https://datasheet.ciiva.com/2041/cd00000447-2041992.pdf?src-supplier=Digi-Key, ComponentLink10Description=https://datasheet.ciiva.com/16443/cd00000447-16443381.pdf?src-supplier=Future+Electronics, ComponentLink10URL=https://datasheet.ciiva.com/16443/cd00000447-16443381.pdf?src-supplier=Future+Electronics, ComponentLink11Description=https://datasheet.ciiva.com/41439/001184659-da-01-en-ic-reg-ldo-5v-l78m05cdt-tr-to-252-3-stm-41439772.pdf?src-supplier=Conrad, ComponentLink11URL=https://datasheet.ciiva.com/41439/001184659-da-01-en-ic-reg-ldo-5v-l78m05cdt-tr-to-252-3-stm-41439772.pdf?src-supplier=Conrad, Height=2.4mm, Lead Free="Lead Free", Length=6.6mm, Manufacturer Part Number=L78M05CDT-TR, Min Output Voltage=5V, Mount="Surface Mount", Nominal Output Voltage=5V, Number of Outputs=1, Number of Pins=3, Number of Regulators=1, Output Configuration=Positive, Output Current=500mA, Output Type=Fixed, Output Voltage=5V, Packaging="Tape and Reel", Polarity=Positive, Pricing 1="1=0,72, 10=0,629, 50=0,629, 100=0,482, 1000=0,305, 10000=0,277 (USD)", Radiation Hardening=No, Reach SVHC Compliant=No, RoHS=Yes, RoHS Compliant=Yes, Series=-, Stock 1=74380, Supplier 1=Mouser, Width=6.2mm
U9: "Linear Voltage Regulator IC Positive Fixed 1 Output 3.3V 150mA SOT-23-5", Case/Package=SOT-23, Dropout Voltage=165mV, Manufacturer=Microchip, Max Operating Temperature=125°C, Max Output Current=150mA, Max Output Voltage=3.3V, Max Supply Voltage=16V, Min Operating Temperature=-40°C, Min Supply Voltage=2.5V, Output Voltage Accuracy=1%, Power Supply Rejection Ratio (PSRR)=75dB, Accuracy=1%, Category="Voltage Regulators - Linear", Height=1.1mm, Lead Free="Lead Free", Length=2.9mm, Manufacturer Part Number=MIC5205-3.3YM5-TR, Max Input Voltage=16V, Min Input Voltage=2.5V, Mount="Surface Mount", Nominal Output Voltage=3.3V, Number of Outputs=1, Number of Pins=5, Number of Regulators=1, Output Current=150mA, Output Type=Fixed, Output Voltage=3.3V, Packaging="Tape and Reel", Polarity=Positive, Pricing 1="1=0,5386, 10=0,5334, 25=0,4417, 50=0,4373, 100=0,395, 250=0,3909, 500=0,3869, 1000=0,3827, 3000=0,3677 (USD)", Radiation Hardening=No, Reach SVHC Compliant=No, RoHS=Yes, RoHS Compliant=Yes, Series=-, Stock 1=2538, Supplier 1="Arrow Electronics", Termination=SMD/SMT, Width=1.6mm
Y1: "Ceramic Resonator 16MHz ±0.5% (Tol) ±0.3% (Stability) 15pF 40Ohm 3-Pin CSMD T/R", Capacitance=15pF, Case/Package=SMD/SMT, Frequency=16MHz, Frequency Stability=0.3%, Frequency Tolerance=0.5%, Manufacturer=Murata, Max Operating Temperature=125°C, Min Operating Temperature=-40°C, Category=Resonators, ComponentLink1Description=https://www.murata.com/en/products/productdata/8801162199070/SPEC-CSTNE16M0V53Z000R0.pdf?src-supplier=Digi-Key, ComponentLink1URL=https://www.murata.com/en/products/productdata/8801162199070/SPEC-CSTNE16M0V53Z000R0.pdf?src-supplier=Digi-Key, Manufacturer Part Number=CSTNE16M0V53Z000R0, Mount="Surface Mount", Packaging="Cut Tape", Pricing 1="3000=0,1298, 6000=0,1244, 15000=0,1189 (USD)", RoHS=Yes, RoHS Compliant=Yes, Series="CERALOCK® CSTNE", Stock 1=87000, Supplier 1="Arrow Electronics", Impedance=40R
Y2: "Ceramic Resonator 12MHz ±0.5% (Tol ) ±0.2% (Stability) 33PF 30Ohm 3-Pin CSMD", Manufacturer=Murata, Category=Resonators, ComponentLink1Description=https://www.murata.com/en/products/productdata/8801162067998/SPEC-CSTNE12M0G550000R0.pdf?src-supplier=Digi-Key, ComponentLink1URL=https://www.murata.com/en/products/productdata/8801162067998/SPEC-CSTNE12M0G550000R0.pdf?src-supplier=Digi-Key, ComponentLink2Description=https://datasheet.octopart.com/CSTNE12M0G550000R0-Murata-datasheet-137044759.pdf?src-supplier=Future+Electronics, ComponentLink2URL=https://datasheet.octopart.com/CSTNE12M0G550000R0-Murata-datasheet-137044759.pdf?src-supplier=Future+Electronics, ComponentLink3Description=https://datasheet.octopart.com/CSTNE12M0G550000R0-Murata-datasheet-165611788.pdf?src-supplier=TME, ComponentLink3URL=https://datasheet.octopart.com/CSTNE12M0G550000R0-Murata-datasheet-165611788.pdf?src-supplier=TME, Manufacturer Part Number=CSTNE12M0G550000R0, Pricing 1="1=77,6, 10=58,2, 50=36,86, 100=27,16, 500=17,46, 1000=15,52, 2000=14,55, 4000=14,36 (JPY)", RoHS=Yes, Stock 1=10, Supplier 1=CoreStaff

## Free pads (board coordinates)
  round 5 hole 3: ""(3.6,3.7) ""(3.6,45.6) ""(60.103,45.094) ""(61.6,3.7)

## Via types
v1: diameter 0.9, hole 0.35, Top Layer to Bottom Layer, tented both sides, 98 vias
v2: diameter 0.7, hole 0.3, Top Layer to Bottom Layer, tented both sides, 27 vias
v3: diameter 0.9, hole 0.4, Top Layer to Bottom Layer, tented both sides, 10 vias
v4: diameter 0.8, hole 0.35, Top Layer to Bottom Layer, tented both sides, 2 vias
v5: diameter 1, hole 0.4, Top Layer to Bottom Layer, tented both sides, 1 vias

## Nets (pads, with @x,y where several pads share a name; then routed paths per layer and width w, separated by ;. In a path a pad name is that pad's centre, name@x,y a point inside that pad or via, vN(x,y) a via of type N, cw(c..) or ccw(c..) an arc to the next point about the centre after c; other vN are vias at no path point)
3V3: C3.2 C5.2 C6.2 C8.2 C9.2 C10.2 C14.2 C15.2 J2.4 J3.6 R5.1 R9.2 R10.2 R13.2 R14.1 U2.4 U2.16 U3. U3.6 U3.18 U5.1 U5.2 U5.4 U5.5 U6.3 U6.7 U6.11 U6.14 U7.3 U7.7 U7.8 U9.5 | length 181.1
  Top Layer w0.25: C10.2 45.027,36.072 U6.11 47.6,36.072 ; U6.14 47.428,37.572 47.6,37.4 47.6,37.1 ; U6.7 48.578,35.072 48.318,35.072 48.128,35.262 48.128,35.872 47.928,36.072 47.6,36.072 ; C9.2 49.988,37.072 U6.3 47.628,37.072 47.6,37.1 ; 47.6,36.072 47.6,37.1
  Top Layer w0.4: U3.6@35.061,18.525 U3.6 ; U3. 35.195,20.259 37.397,20.259 37.956,19.7 ; U3.6@35.195,18.509 35.991,18.509 36.716,17.784 ; v2(36.9,29.3) 36.9,29.381 37.006,29.487 U5.5 37.006,36.678 ; v2(38.4,7.2) R13.2 38.418,8.832 40.463,8.832 U7.3 ; C8.2 C8.2@40.75,39.7 ; J2.4 37.006,39.596 U5.4 37.006,36.678 ; C10.2 44.816,35.961 44.616,36.161 44.616,36.192 44.382,36.427 44.373,36.427 41.3,39.5 40.95,39.5 C8.2@40.75,39.7 ; 37.006,36.678 39.272,36.678 39.506,36.912 U5.2 U5.1 40.778,37.9 40.778,39.672 C8.2@40.75,39.7
  Top Layer w0.5: U2.16 24.032,29.178 24.978,29.178 28.711,32.911 29.455,32.911 U2.4 29.575,33.031 30.141,33.031 U2.4@30.142,33.032 ; C6.2@33.15,18.584 U3.6 ; C5.2 33.366,20.184 U3. ; 36.716,17.784 37.956,17.784 ; 37.956,19.7 37.956,17.784 ; U7.7 U7.8 47.691,16.009 45.941,17.759 43.745,17.759 U3.18 39.9,17.784 37.956,17.784
  Top Layer w0.55: 39.9,17.784 v3(39.9,18.8)
  Top Layer w0.6: U9.5 19.417,25.793 ; v3(19.7,22) 19.655,21.955 18.328,21.955 18.313,21.97 18.313,22.713 19.417,23.817 19.417,25.793 ; v2(24.1,28.1) 24.081,28.119 24.081,29.151 24.071,29.161 U2.16 23.67,29.161 23.66,29.171 23.66,29.191 23.309,29.542 C3.2 22.125,29.442 22.125,28.725 21.2,27.8 20.2,27.8 19.417,27.017 19.417,25.793 ; v2(36.9,29.3) 36.919,29.281 37.619,29.281 38.1,28.8 38.2,28.8 R5.1 ; R9.2 R10.2 v3(44.5,29)
  Top Layer w0.8: C14.2 15.783,28.526 17.492,26.817 17.492,25.851 U9.5@17.495,25.848
  Top Layer w1: C15.2 C14.2
  Bottom Layer w0.6: v3(19.7,22) 30.285,22 33.826,18.459 38.859,18.459 39.195,18.795 39.895,18.795 v3(39.9,18.8) ; v2(24.1,28.1) 25.4,28.1 26.6,29.3 v2(36.9,29.3) ; J3.6 43.949,2.2 43.407,2.742 43.358,2.742 38.919,7.181 38.419,7.181 v2(38.4,7.2) 38.381,7.219 37.481,7.219 36.25,8.45 36.25,10.35 39.9,14 v3(39.9,18.8) ; v3(44.5,29) 44.5,24.9 39.9,20.3 v3(39.9,18.8)
5V: C2.1 C12.2 C13.2 FB1.1 U8.3 U9.1 U9.3 | length 61.9
  Top Layer w0.7: v5(3,35.8) 3.03,35.77 3.03,34.017 C12.2 ; C13.2@12.616,22.93 12.966,22.93 C13.2 ; C13.2@13.316,22.93 13.887,22.93 14.855,23.898 15.873,23.898 16.245,24.27 16.245,25.416 15.873,25.788 15.1,25.788 U9.1 v1(13.707,25.793)
  Top Layer w0.8: v1(28.3,40.2) 28.319,40.219 28.75,40.219 29.708,41.177 FB1.1 FB1.1@30.06,41.175 ; FB1.1@30.081,41.154 FB1.1@30.06,41.175 ; C2.1 32.229,41.175 FB1.1@30.06,41.175
  Top Layer w1: C12.2 3.08,33.967 5.585,33.967 U8.3 5.606,33.296 U8.3@5.756,33.146
  Bottom Layer w0.7: v5(3,35.8) 5.6,35.8 13.707,27.693 v1(13.707,25.793)
  Bottom Layer w0.8: v5(3,35.8) 3,37.6 5.6,40.2 v1(28.3,40.2)
BUZZER: U3.25 U4.2 | length 19.4
  Top Layer w0.4: U3.25 42.22,24.525 42.295,24.6 42.8,24.6 46.8,28.6 53.9,28.6 57.5,32.2 U4.2
CH340G-DTR: C7.1 U2.13 | length 2.9
  Top Layer w0.5: C7.1 22.237,31.586 22.237,32.463 22.745,32.971 U2.13
CH340G-RX: R2.2 U3.31 | length 12.1
  Top Layer w0.25: R2.2 32.881,31.982 32.606,31.707 32.507,31.707 32.106,31.306 32.106,27.792 34.498,25.4 37.026,25.4 37.363,25.062 37.363,24.141 U3.31
CH340G-TX: R1.2 U3.30 | length 9
  Top Layer w0.25: R1.2 33.1,29.958 33.1,29.2 35.9,26.4 37.1,26.4 38.22,25.28 U3.30
CH340G-XI: R4.2 U2.7 Y2.1 | length 4.6
  Top Layer w0.25: U2.7 31.225,36.781 31.339,36.667 31.339,34.053 R4.2
CH340G-XO: R3.1 R4.1 Y2.3 | length 5.6
  Top Layer w0.25: R3.1 32.893,38.84 33.687,38.046 33.687,36.313 Y2.3 33.625,36.225 33.625,35.246 33.18,34.801 33.18,34.262 R4.1
CH340G-XO-R: R3.2 U2.8 | length 2.3
  Top Layer w0.25: U2.8 30.604,38.051 31.393,38.84 R3.2
DP1: R11.2 R15.1 | length 20.6
  Top Layer w0.7: R15.1 19.427,18.227 23.73,22.53 R11.2@31.65,22.53
DP1-R: R11.1 U3.1 | length 1.7
  Top Layer w0.4: R11.1@33.425,22.53 33.452,22.557 35.093,22.557 U3.1
DP2: R12.2 R17.1 | length 12.1
  Top Layer w0.7: R12.2 47.503,21.16 49.513,19.15 49.513,13.402 51.315,11.6 52.15,11.6 R17.1
DP2-R: R12.1 U3.23 | length 2.5
  Top Layer w0.5: U3.23 43.745,21.759 44.606,21.759 45.146,21.219 45.962,21.219 R12.1
GND: C1.2 C2.2 C3.1 C4.2 C5.1 C6.1 C8.1 C9.1 C10.1 C11.1 C12.1 C13.1 C14.1 C15.1 D1.K D2.1 D3.K J1.5 J2.2 J3.1 J4.2 J5.2 J6.2 pad. Q1.1 Q1.3 Q2.1 Q2.3 R16.1 R18.1 S1.3 U2.1 U3.3 U3.5 U3.21 U4.1 U5.3 U6.2 U6.4 U6.6 U6.10 U6.15 U7.4 U8.2 U9.2 Y1.2 Y2.2 | length 42.3
  Top Layer w0.2: v2(44.2,34.5) 44.2,34.596 44.854,35.25 45.622,35.25 45.636,35.236 ; 49.178,37.572 49.4,37.794 49.4,37.808 49.93,38.338 v2(50.2,38.338)
  Top Layer w0.25: Y1.2 32.95,15.4 33.264,15.086 33.614,15.086 v2(33.7,15) ; C10.1 45.016,37.461 45.627,38.072 U6.15 ; 45.65,35.222 45.798,35.37 45.798,35.382 45.988,35.572 46.248,35.572 U6.10 ; U6.6 49.988,35.572 50.1,35.684 C9.1 50.15,35.834 49.412,36.572 49.178,36.572 U6.4 ; U6.2 48.918,37.572 49.178,37.572 ; v2@50.114,38.252 v2(50.2,38.338)
  Top Layer w0.4: v2(32.2,37.9) 32.2,37.819 32.5,37.519 Y2.2 ; U3.3 35.128,20.992 36.311,20.992 36.843,21.524 36.843,21.643 v2(36.9,21.7) ; U3.5@35.162,19.342 U3.5 35.133,19.396 36.888,19.396 v2(36.9,19.409) ; v3(41.8,20.2) 41.808,20.192 43.712,20.192 U3.21 ; v2(44.9,38.8) 44.908,38.792 44.908,37.469 C10.1
  Top Layer w0.6: v3(13.7,24.5) 13.781,24.5 14.079,24.798 15.05,24.798 U9.2
  Top Layer w0.7: Q1.3 11.619,14.818 11.619,14.11 12.136,13.593 13.542,13.593 14.059,14.11 14.059,14.818 Q1.1 ; v3(30.3,20.4) C5.1 C6.1 ; C4.2 47.553,19.305 47.553,18.101 47.6,18.054 v3(47.6,18) ; C9.1@50.1,35.684 50.2,35.584 v2(50.2,34.9) ; v4(50.9,13.5) 50.919,13.519 50.919,14.883 51.018,14.982 51.018,15.615 51.61,16.207 52.866,16.207 53.458,15.615 53.458,14.982 Q2.3
  Top Layer w0.8: v4(14.1,16.3) 14.109,16.291 Q1.1 ; C2.2 C2.2@33.729,41.186 ; C1.2 C2.2@33.729,41.186 ; v1(35,41.2) 34.986,41.186 C2.2@33.729,41.186
  other v1: 37.1,1.6 38.6,1.6 40.1,1.6 41.6,1.6 8.6,2.1 10.1,2.1 11.6,2.1 37.1,3.1 38.6,3.1 40.1,3.1 8.6,3.6 10.1,3.6 11.6,3.6 37.1,4.6 38.6,4.6 10.1,5 11.6,5 10.1,6.5 11.6,6.5 17.6,13.1 19.1,13.1 20.6,13.1 22.1,13.1 23.6,13.1 25.1,13.1 26.6,13.1 17.6,14.6 19.1,14.6 20.6,14.6 22.1,14.6 23.6,14.6 25.1,14.6 26.6,14.6 51.6,22.6 53.1,22.6 54.6,22.6 51.6,24.1 53.1,24.1 54.6,24.1 60.1,24.2 61.6,24.2 63.1,24.2 1.6,24.6 3.1,24.6 51.6,25.6 53.1,25.6 54.6,25.6 60.1,25.7 61.6,25.7 63.1,25.7 1.6,26 3.1,26 51.6,27.1 53.1,27.1 54.6,27.1 60.1,27.2 61.6,27.2 63.1,27.2 1.6,27.5 3.1,27.5 1.6,29 3.1,29 20.1,35.1 21.6,35.1 20.1,36.6 21.6,36.6 20.1,38.1 21.6,38.1 28.3,41.4 21.6,41.6 23.1,41.6 24.6,41.6 47.6,41.6 49.1,41.6 50.6,41.6 52.1,41.6 53.6,41.6 55.1,41.6 21.6,43.1 23.1,43.1 24.6,43.1 47.6,43.1 49.1,43.1 50.6,43.1 52.1,43.1 53.6,43.1 55.1,43.1 56.6,43.1 47.6,44.6 49.1,44.6 50.6,44.6 52.1,44.6 53.6,44.6 55.1,44.6 56.6,44.6
  other v2: 38.4,6.2 40.4,26.3 23,28.1 36.9,28.3 38.8,31.6 38.8,32.9
  other v3: 41.1,18.8 19.7,20.8 44.5,30.2
INPUT: F1.1 J6.1 | length 11.2
  Top Layer w1: F1.1 5.063,37.985 5.063,40.663 9.097,44.697 11.497,44.697 J6.1
MCU-AREF: C4.1 U3.20 | length 2.3
  Top Layer w0.5: U3.20 43.734,19.369 45.989,19.369 C4.1
MCU-LED: R8.1 U3.24 | length 2.6
  Top Layer w0.5: U3.24 45.493,22.584 45.975,23.065 R8.1
MCU-MISO: J3.3 U3.16 U7.2 | length 21.7
  Top Layer w0.25: U7.2 U7.2@40.996,10.084 ; U3.16 42.362,15.342 42.362,11.723 41.161,10.522 41.161,10.249 U7.2@40.996,10.084 ; J3.3@51.706,2.2 51.706,4.294 50.4,5.6 46.049,5.6 41.565,10.084 U7.2@40.996,10.084
MCU-MOSI: J3.4 U3.15 U7.5 | length 18.4
  Top Layer w0.25: v2(41.4,13.8) 41.41,13.81 41.41,15.474 U3.15 ; v2(45.9,7.5) 45.922,7.522 47.669,7.522 U7.5 ; J3.4@49.166,2.591 J3.4@49.166,2.691
  Bottom Layer w0.25: v2(41.4,13.8) 41.4,12 v2(45.9,7.5) 49.166,4.234 J3.4@49.166,2.2
MCU-RESET: C7.2 R5.2 S1.2 U3.29 | length 28.8
  Top Layer w0.4: S1.2 22.173,25.401 22.173,27.173 v2(22.2,27.2) ; v2(36.9,27.3) 36.95,27.25 38.25,27.25 R5.2 38.3,26.264 39.02,25.544 U3.29 U3.29@39.013,24.091
  Top Layer w0.6: v2(19.4,31.6) 19.413,31.587 20.712,31.587 C7.2
  Bottom Layer w0.4: v2(19.4,31.6) 19.4,29.2 21.343,27.257 22.143,27.257 v2(22.2,27.2) 36.719,27.2 36.819,27.3 v2(36.9,27.3)
MCU-RX-GPS: J5.3 U3.11 | length 16.9
  Top Layer w0.25: J5.3 27.91,6.11 31.544,9.744 35.044,9.744 38.22,12.92 U3.11
MCU-RX-RF: J4.3 U3.9 | length 26.2
  Top Layer w0.25: J4.3 16.48,6.18 22.5,12.2 34.9,12.2 36.62,13.92 U3.9
MCU-SCK: J3.2 U3.17 U7.6 | length 21.5
  Top Layer w0.25: U3.17 43.74,16.964 44.699,16.964 45.483,16.18 45.483,9.957 46.626,8.814 U7.6 49.686,8.814 54.246,4.254 J3.2@54.246,2.2
MCU-SCL: J2.1 R10.1 U3.28 U5.8 U6.8 | length 39.5
  Top Layer w0.25: v2(38.8,30.5) 39.6,30.5 ; U3.28@39.67,24.234 U3.28 ; U3.28@39.8,24.8 39.6,25 39.6,29 ; U5.8 40.756,33.756 40.7,33.7 ; R10.1@41.35,29 39.6,29 ; U6.8 47.583,34.083 47.2,33.7 40.7,33.7 ; 39.6,29 39.6,30.5 ; 39.6,30.5 39.6,32.6 40.7,33.7
  Bottom Layer w0.25: J2.1 36.89,46.769 36.3,46.179 36.3,33 v2(38.8,30.5)
MCU-SDA: J2.3 R9.1 U3.27 U5.7 U6.9 | length 35.7
  Top Layer w0.25: v2(38.8,34) 39.512,34.712 39.512,35.472 U5.7 ; v2(40.4,27.4) 41.325,27.4 41.4,27.325 R9.1@41.4,27.1 ; U3.27 40.62,25.22 41.6,26.2 41.6,26.9 R9.1@41.4,27.1 ; R9.1 R9.1@41.4,27.1 ; v2(45.2,34.5) 45.286,34.586 45.812,34.586 46.248,35.022 46.368,35.022 U6.9
  Bottom Layer w0.25: v2(40.4,27.4) 40.4,33.1 ; J2.3@41.922,46.941 41.657,46.941 41.657,46.687 38.8,43.83 v2(38.8,34) 39.7,33.1 40.4,33.1 ; v2@45.114,34.414 v2(45.2,34.5) ; v2@45.2,34.4 43.9,33.1 40.4,33.1
MCU-SS: J3.5 R13.1 U3.14 U7.1 | length 21.9
  Top Layer w0.25: v2(37.2,9) 37.286,9.086 37.286,9.236 38.025,9.975 38.025,10.075 38.3,10.35 R13.1 ; R13.1@38.425,10.35 R13.1 ; U7.1 40.316,11.189 39.589,11.189 39.025,10.625 38.675,10.625 R13.1 ; U7.1@40.62,11.493 U3.14
  Bottom Layer w0.25: v2(37.2,9) 38.1,8.1 42.8,8.1 46.626,4.274 J3.5@46.626,2.2
MCU-TX-GPS: J5.1 U3.12 | length 13.1
  Top Layer w0.25: J5.1 32.91,6.29 39.02,12.4 U3.12
MCU-TX-RF: J4.1 U3.10 | length 22.3
  Top Layer w0.25: J4.1 21.48,6.22 26.06,10.8 34.8,10.8 37.42,13.42 U3.10
MCU-XTAL1: R7.2 U3.7 Y1.1 | length 6
  Top Layer w0.25: R7.2@30,15.8 30.1,15.8 30.375,16.075 30.375,16.1 30.875,16.6 Y1.1 32.264,16.664 33.316,16.664 33.88,17.229 34.285,17.634 34.97,17.634 U3.7
MCU-XTAL2: R6.2 U3.8 | length 1.6
  Top Layer w0.25: R6.2 34.845,15.55 35.12,15.825 U3.8
NetC1_1: C1.1 FB1.2 J1.1 | length 4.7
  Top Layer w0.4: J1.1 28.912,43.177 29.213,42.877 FB1.2@29.458,42.877
  Top Layer w0.8: FB1.2 C1.1
NetC11_2: C11.2 D2.2 F1.2 U8.1 | length 11.1
  Top Layer w1: F1.2 8.965,37.988 12.126,37.988 12.19,38.051 12.249,38.051 12.894,37.407 D2.2@12.894,37.347 ; U8.1 10.166,34.596 10.316,34.746 10.966,34.746 10.969,34.749 C11.2 12.983,34.766 12.983,37.983 D2.2
NetD1_A: D1.A R8.2 | length 2.5
  Top Layer w0.5: R8.2 47.474,24.619 47.957,25.101 D1.A
NetD3_A: D3.A R14.2 | length 2.5
  Top Layer w0.7: D3.A 16.037,20.094 16.994,20.094 17,20.1 17.763,20.1 18.073,20.41 R14.2
NetJ7_1: J7.1 Q1.5 Q1.6 Q1.7 Q1.8 | length 9.9
  Top Layer w0.8: J7.1 4.232,9.447 10.299,9.447 Q1.5 Q1.6 Q1.7 Q1.8
NetJ7_2: J7.2 J7.3 | length 5
  Top Layer w1: J7.2 J7.3
NetJ8_1: J8.1 Q2.5 Q2.6 Q2.7 Q2.8 | length 9.9
  Top Layer w0.8: Q2.8@51.268,20.282 J8.1@61.102,20.282 ; J8.1@61.102,20.296 J8.1
NetJ8_2: J8.2 J8.3 | length 5
  Top Layer w1: J8.3 J8.2
NetQ1_2: Q1.2 Q1.4 R15.2 R16.2 | length 6.3
  Top Layer w0.7: R16.2 R15.2
  Top Layer w0.8: Q1.4 R16.2 ; Q1.2 R15.2
NetQ2_2: Q2.2 Q2.4 R17.2 R18.2 | length 6.4
  Top Layer w0.7: R17.2 52.225,13.075 R17.2@52.263,13.075 ; Q2.2 52.238,13.1 R17.2@52.263,13.075 ; R17.2@52.3,13.05 52.288,13.05 R17.2@52.263,13.075 ; Q2.4 54.789,14.921 54.789,13.111 R18.2 54.775,13.075 R17.2@52.263,13.075
NetR1_1: R1.1 U2.2 | length 2
  Top Layer w0.6: U2.2 31.227,30.431 31.381,30.277 R1.1
NetR2_1: R2.1 U2.3 | length 2.1
  Top Layer w0.6: U2.3 31.1,31.701 31.381,31.982 R2.1
NetR6_1: R6.1 R7.1 Y1.3 | length 4.9
  Top Layer w0.25: R7.1 30.05,14.2 34.626,14.2 R6.1@34.788,14.038
USB_D_N: J1.2 U2.6 | length 12.3
  Top Layer w0.26: J1.2 28.169,44.922 28.169,43.814 26.963,42.608 26.963,36.614 28.47,35.108 28.838,35.108 28.99,35.26 28.99,35.331 29.17,35.511 U2.6
USB_D_P: J1.3 U2.5 | length 13.1
  Top Layer w0.26: J1.3 27.706,44.922 27.706,44.006 27.495,43.795 26.5,42.8 26.5,36.422 28.278,34.644 28.838,34.644 28.99,34.492 28.99,34.421 29.17,34.241 U2.5
pads on no net: J1.4 J1.S1 J1.S2 J1.S3 J1.S4 J1.S5 J1.S6 S1.1 S1.4 U2.9 U2.10 U2.11 U2.12 U2.14 U2.15 U3.2 U3.13 U3.19 U3.22 U3.26 U3.32 U5.6 U6.1 U6.5 U6.12 U6.13 U6.16 U9.4

## Polygon pours and split planes (outlines as drawn)
GND on Top Layer "GND_L01_P000" (solid, pour order 0): 2.1,0.1 cw(c2.1,2.1) 0.1,2.1 0.1,47.1 cw(c2.1,47.1) 2.1,49.1 63.1,49.1 cw(c63.1,47.1) 65.1,47.1 65.1,2.1 cw(c63.1,2.1) 63.1,0.1
GND on Int1 (GND) "GND_L02_P001" (solid, pour order 1): 2.1,0.1 cw(c2.1,2.1) 0.1,2.1 0.1,47.1 cw(c2.1,47.1) 2.1,49.1 63.1,49.1 cw(c63.1,47.1) 65.1,47.1 65.1,2.1 cw(c63.1,2.1) 63.1,0.1
GND on Int2 (PWR) "GND_L03_P002" (solid, pour order 2): 2.1,0.1 cw(c2.1,2.1) 0.1,2.1 0.1,47.1 cw(c2.1,47.1) 2.1,49.1 63.1,49.1 cw(c63.1,47.1) 65.1,47.1 65.1,2.1 cw(c63.1,2.1) 63.1,0.1